# Altium PCB Sinistro_TestBed_RevA-1.PcbDoc (part 1 of 4)
Units mil, origin at the board's own origin, x right, y up, seen from the top; angles counter-clockwise.
Board outline 17000 x 8000 mil, 7 copper layers (Top Layer (*.GTL), MidLayer1 (*.G1), MidLayer2 (*.G2), MidLayer3 (*.G3), DIG GND (*.GP1), AGND (*.GP2), Bottom Layer (*.GBL)); 262 components, 309 nets, 2223 pads, 663 vias.
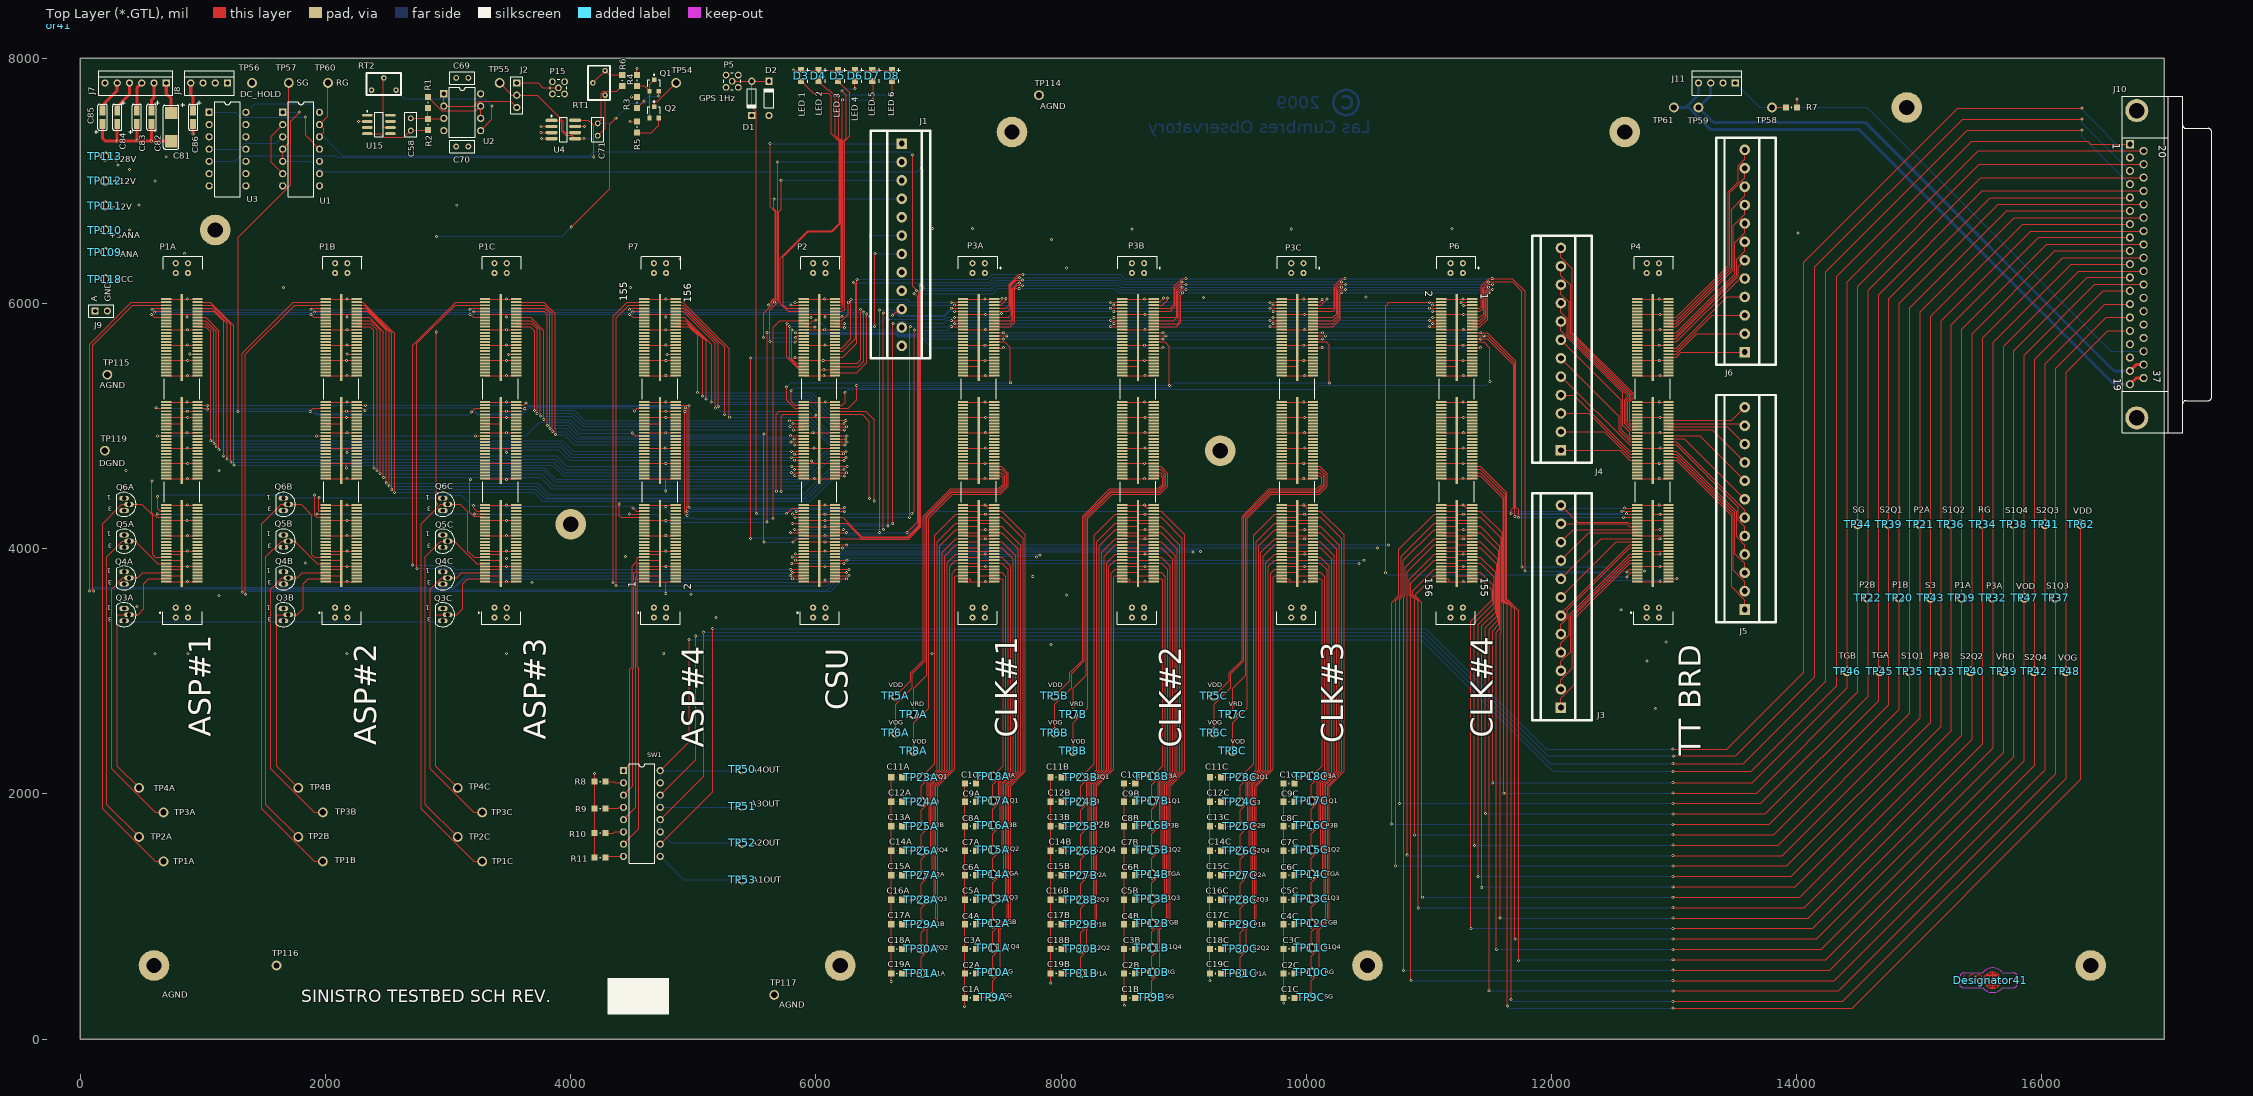
[diagram p0: Top Layer (*.GTL) view]
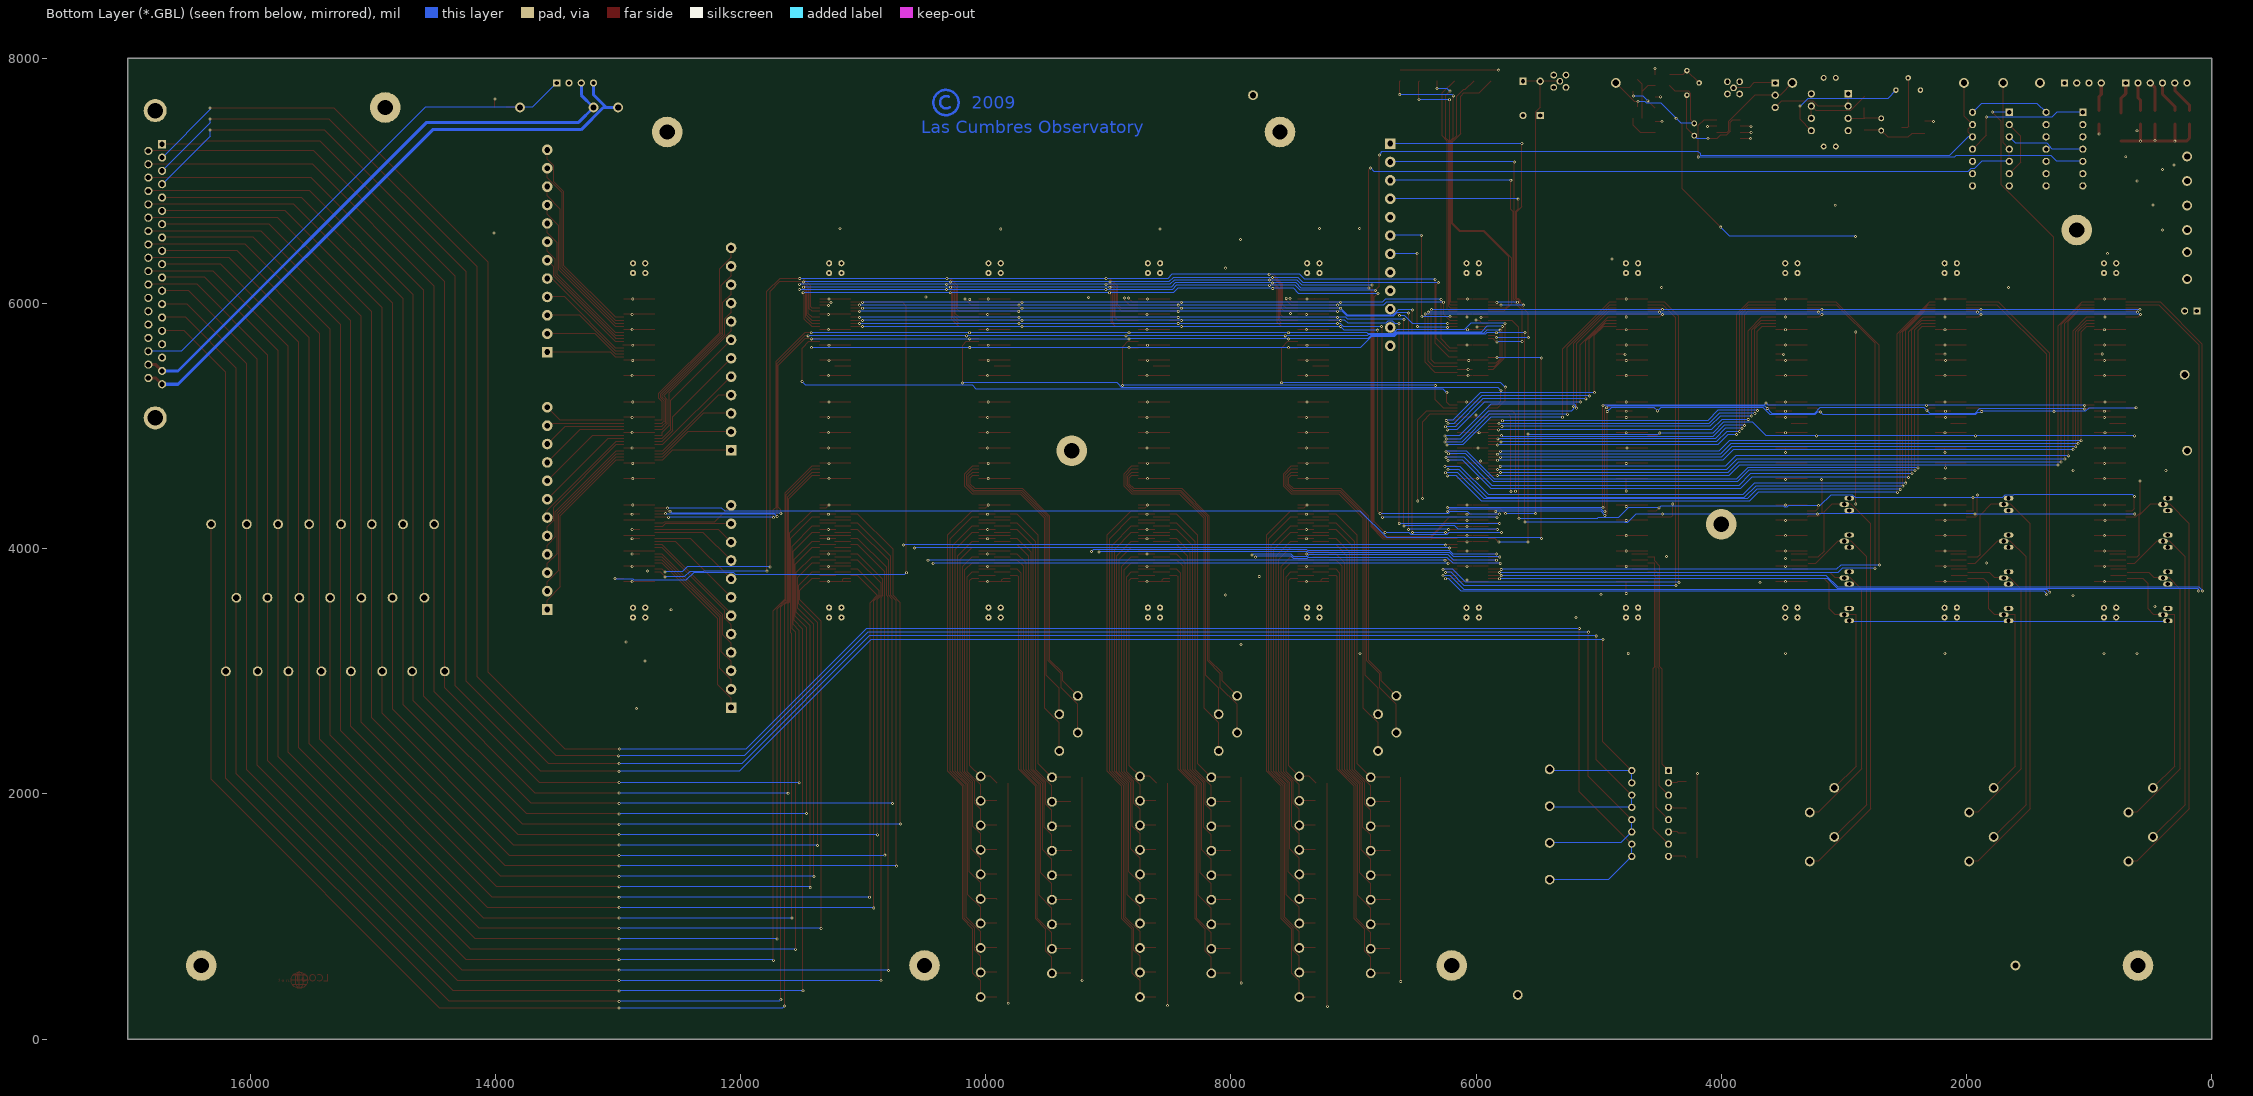
[diagram p1: Bottom Layer (*.GBL) view, seen from below]
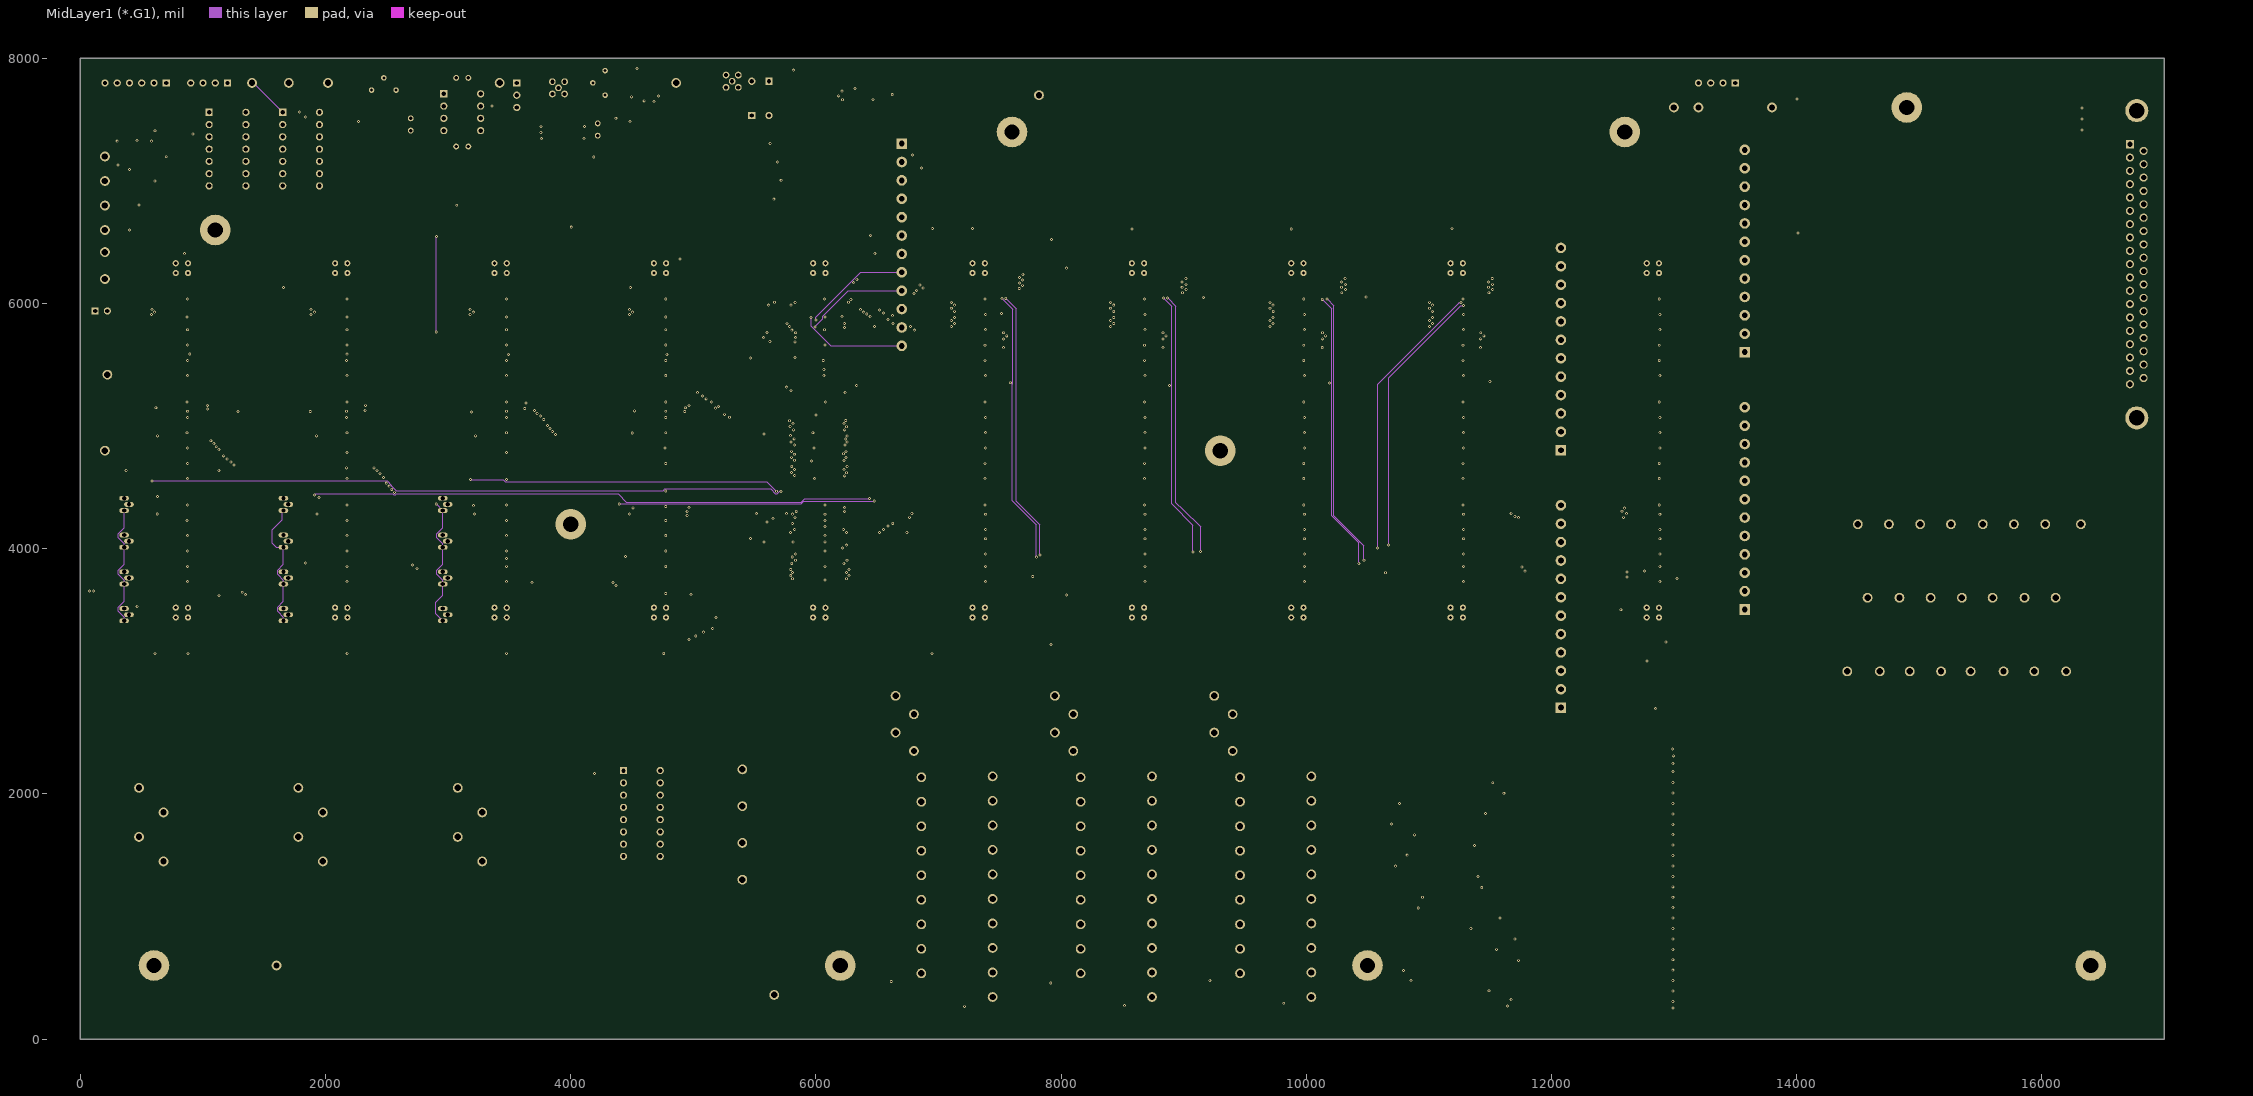
[diagram p2: MidLayer1 (*.G1)]
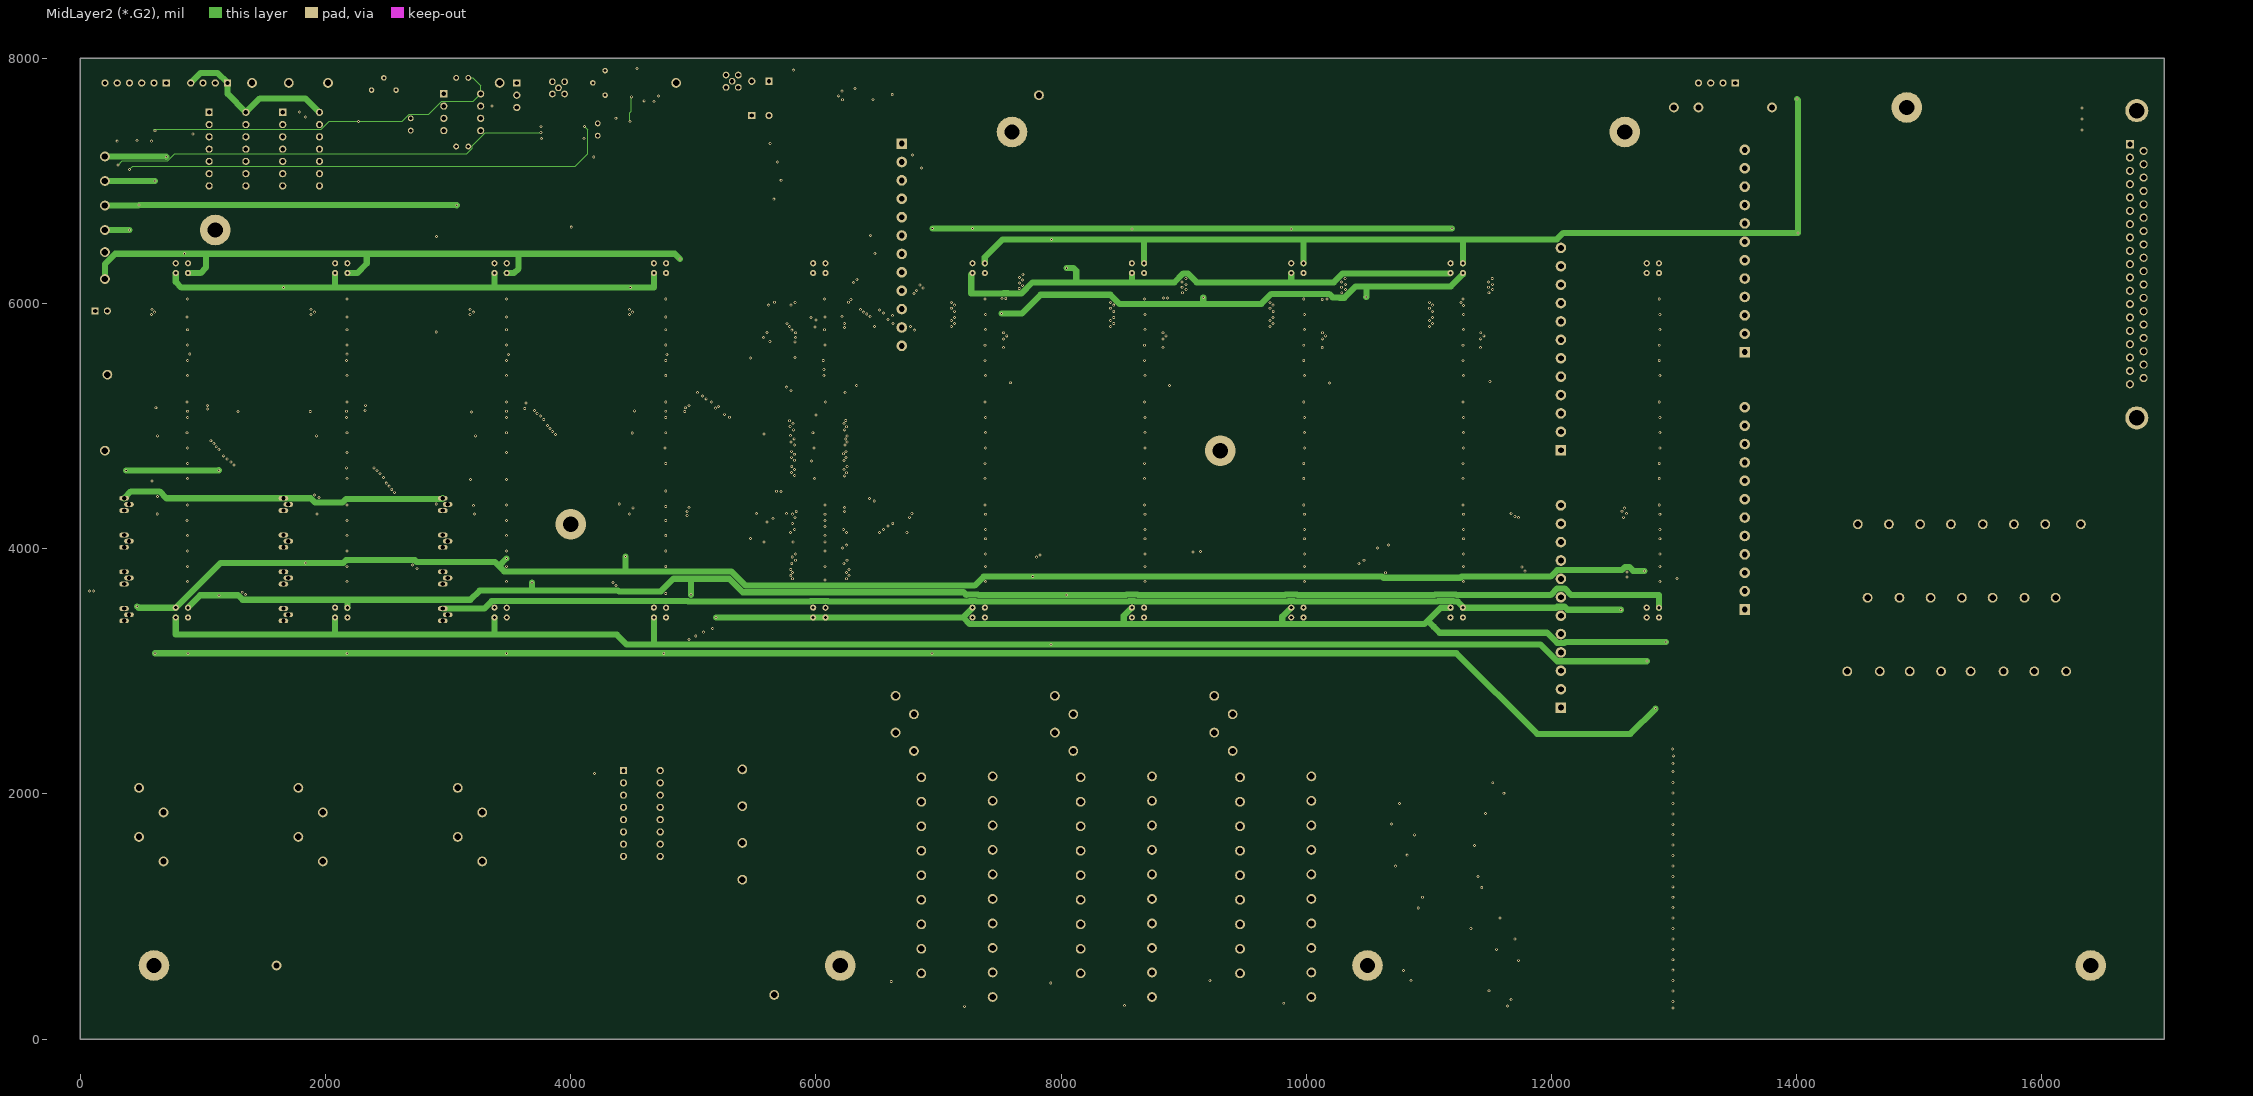
[diagram p3: MidLayer2 (*.G2)]
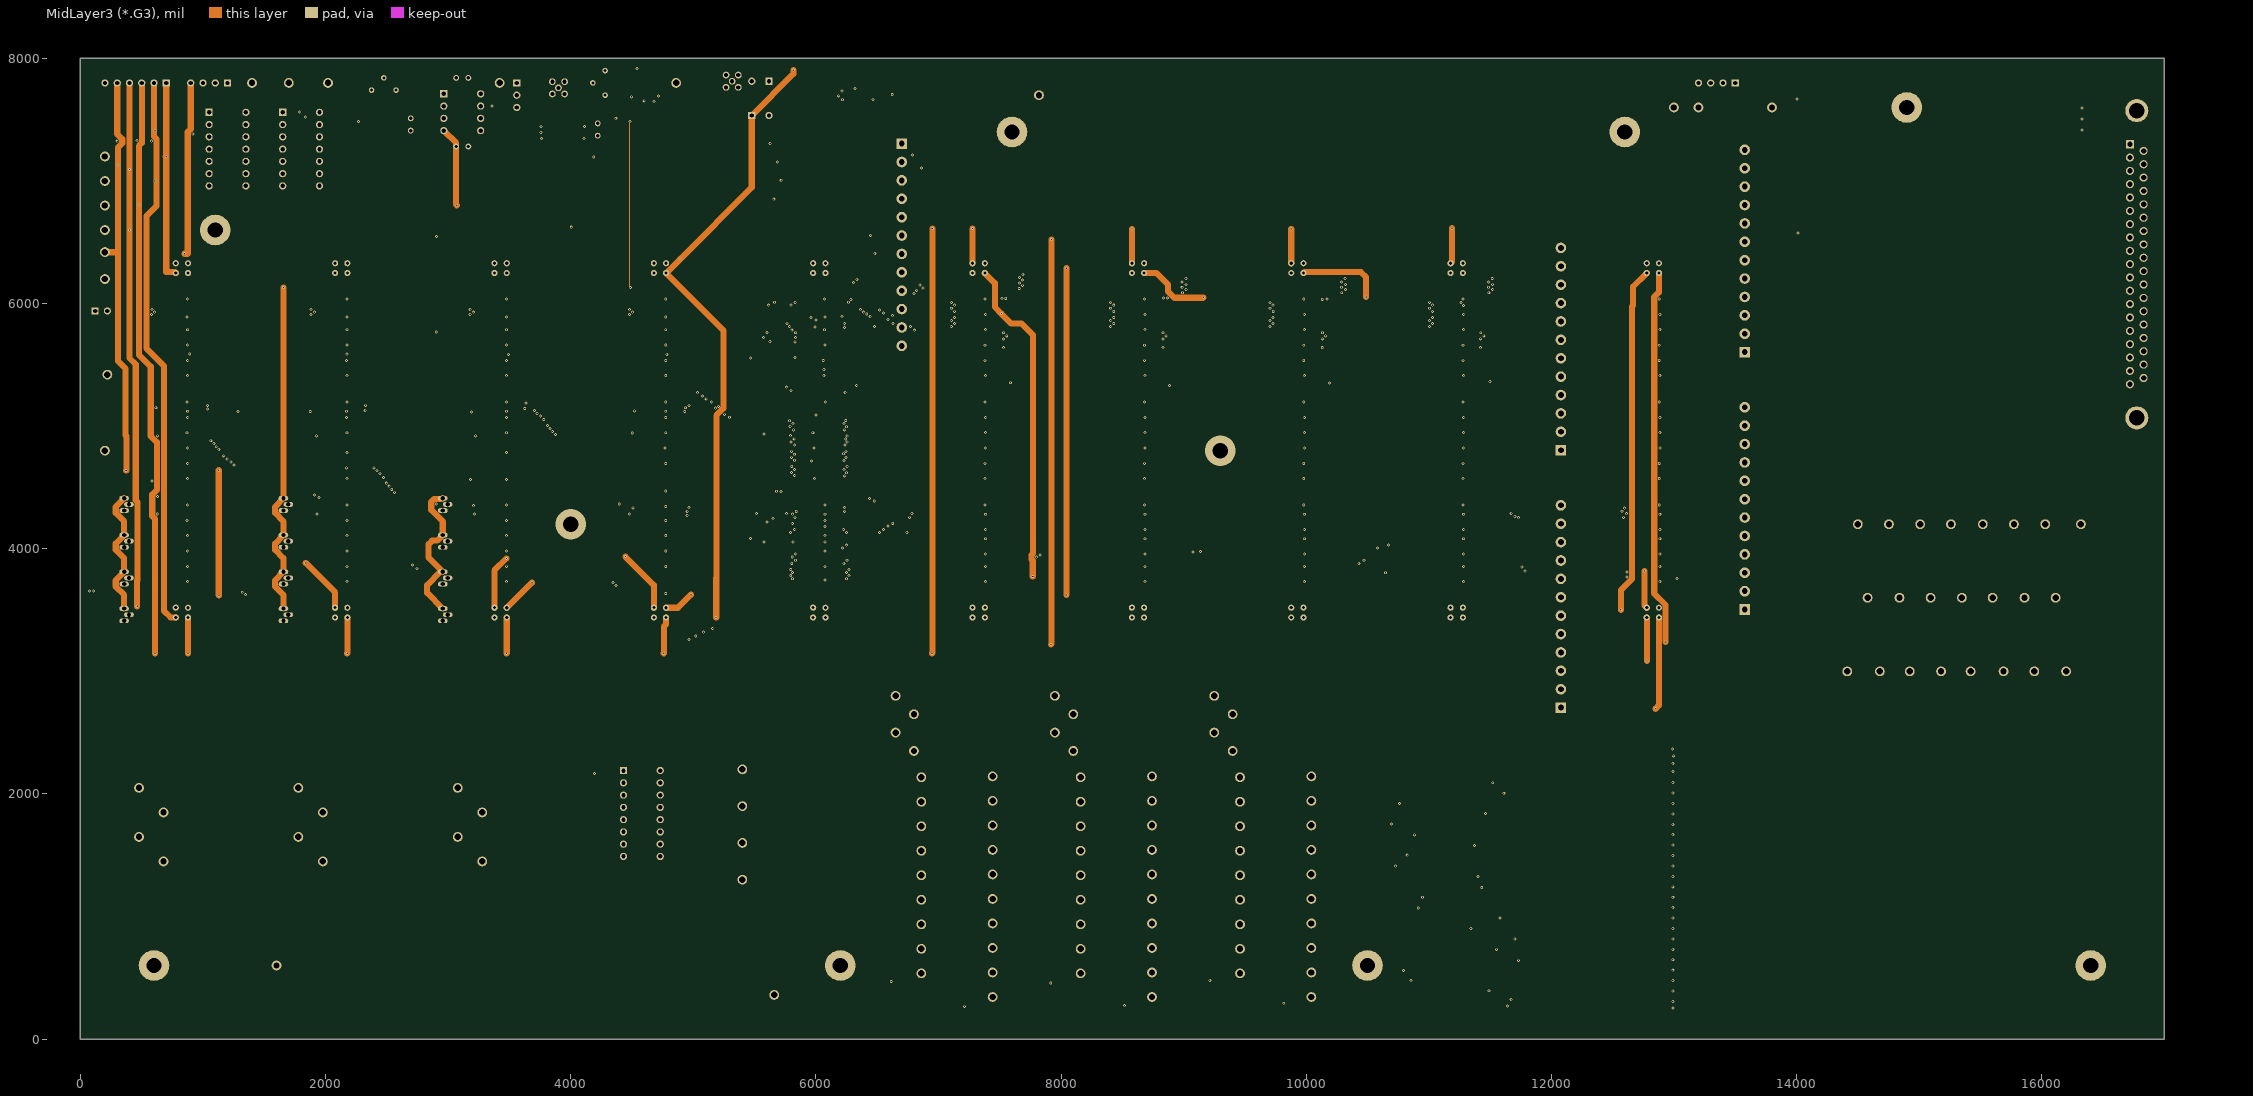
[diagram p4: MidLayer3 (*.G3)]
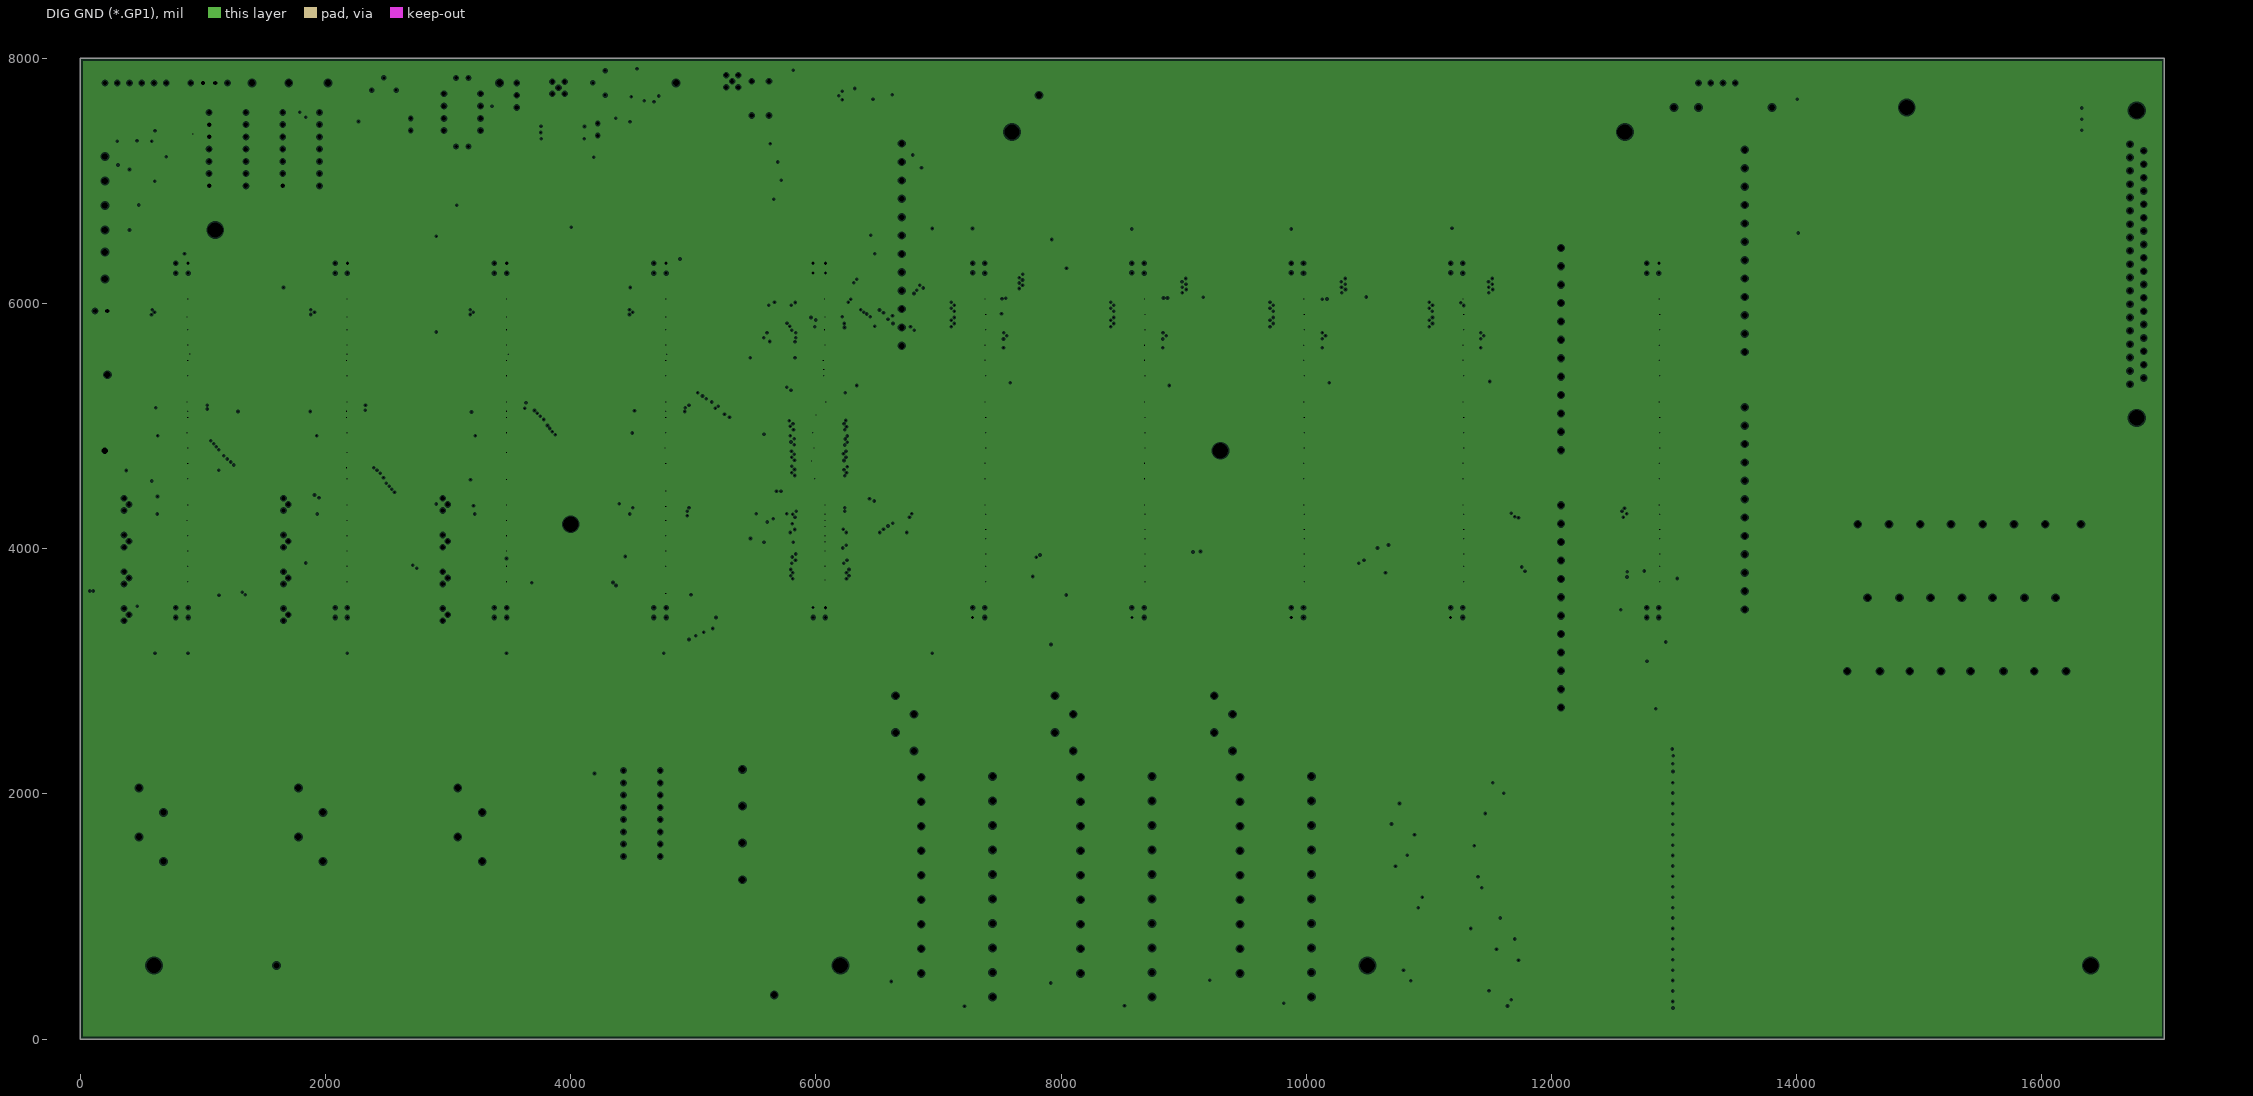
[diagram p5: DIG GND (*.GP1), clearances drawn from the general rule]
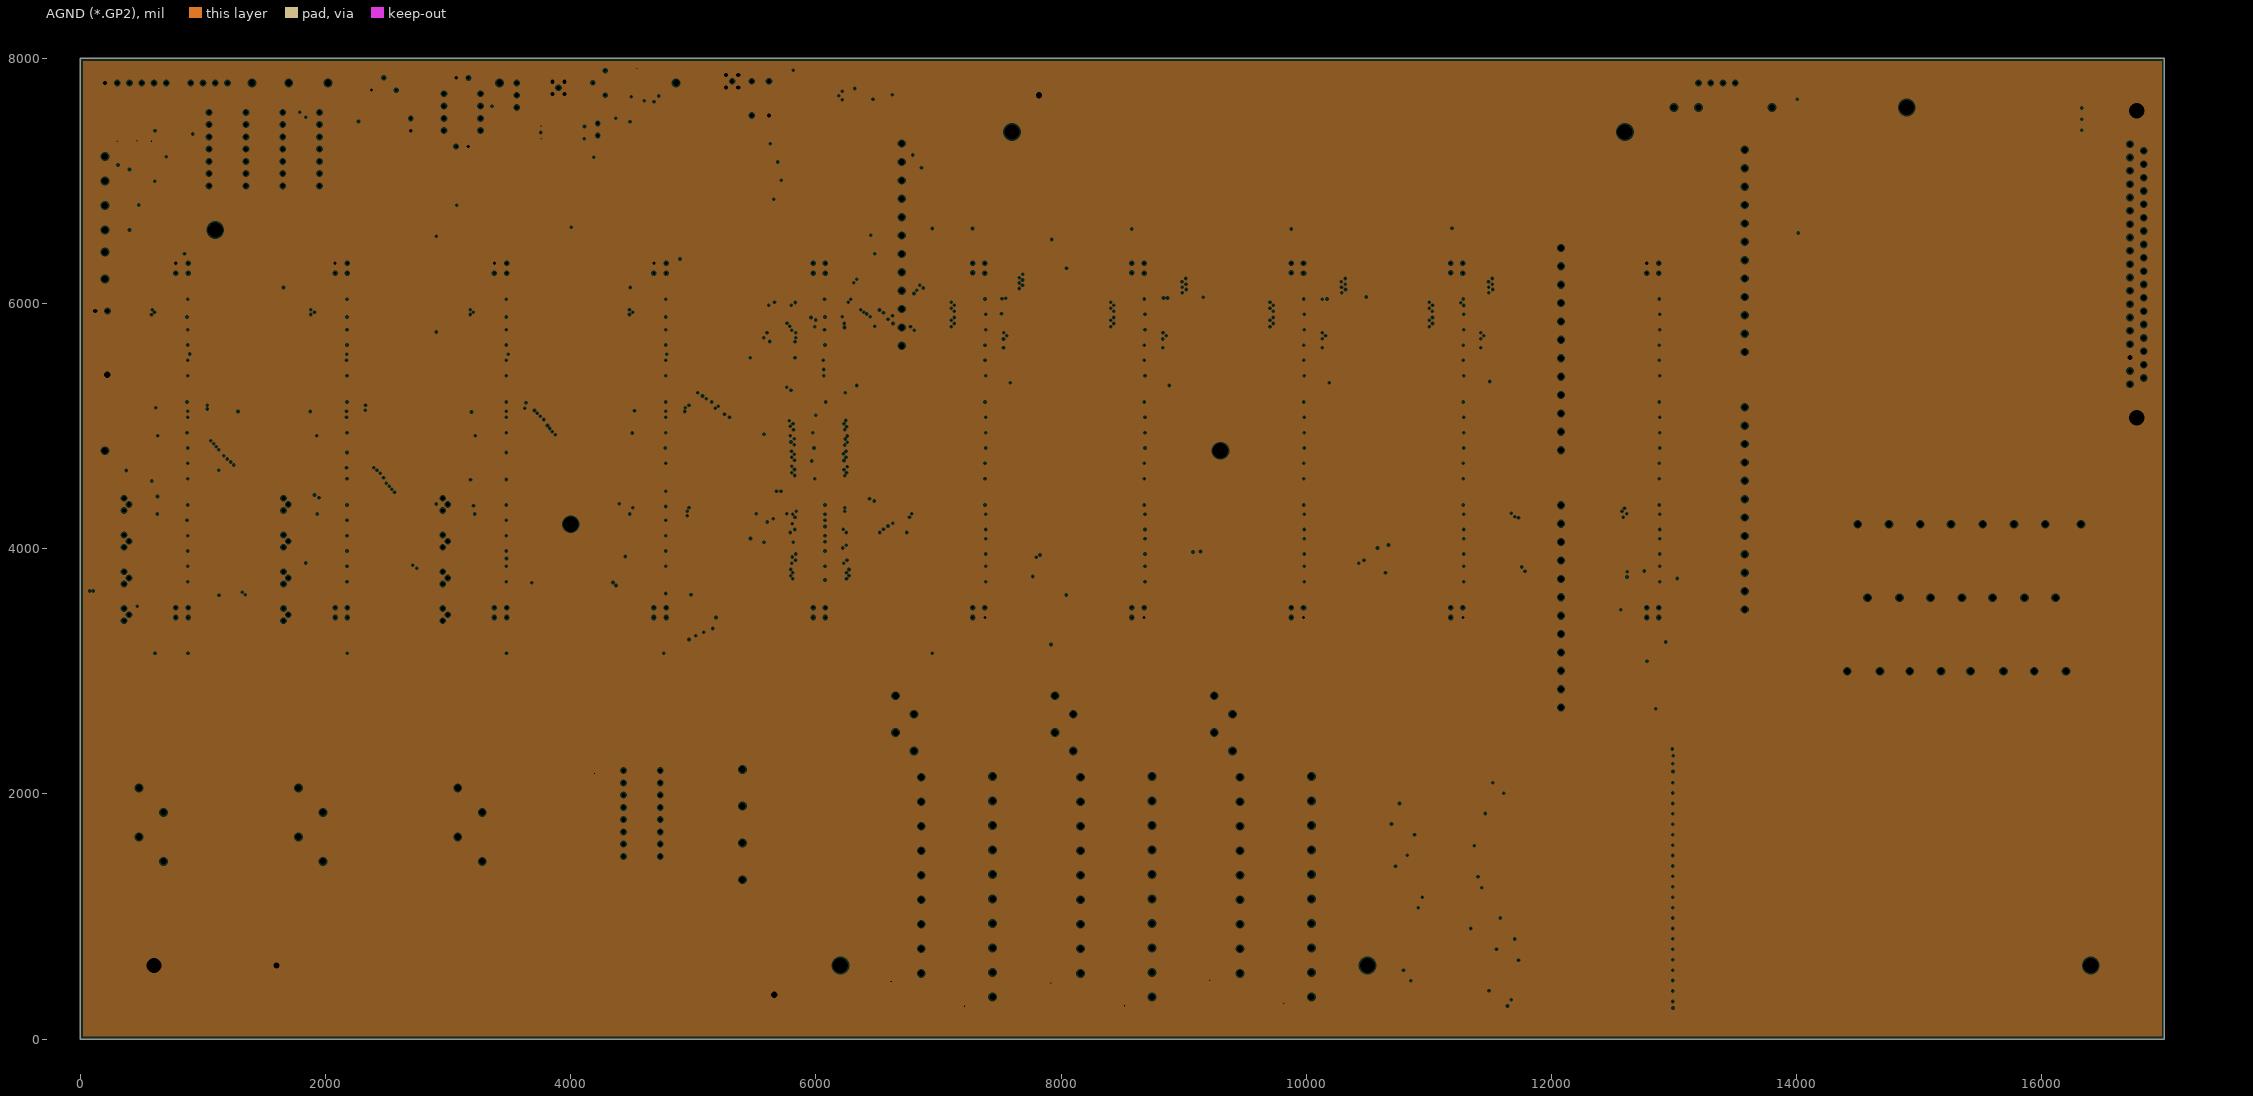
[diagram p6: AGND (*.GP2), clearances drawn from the general rule]

## Layer stack, top to bottom
Top Layer (*.GTL): signal copper 1.4
Dielectric: core 12.6, FR-4, Dk 4.8
MidLayer1 (*.G1): signal copper 1.4
Dielectric: prepreg 12.6, FR-4, Dk 4.8
MidLayer2 (*.G2): signal copper 1.4
Dielectric: core 12.6, FR-4, Dk 4.8
MidLayer3 (*.G3): signal copper 1.4
Dielectric: prepreg 12.6, FR-4, Dk 4.8
DIG GND (*.GP1): plane copper 1.4, net GND
Dielectric: core 12.6, FR-4, Dk 4.8
AGND (*.GP2): plane copper 1.4, net A
Dielectric: prepreg 12.6, FR-4, Dk 4.8
Bottom Layer (*.GBL): signal copper 1.4

## Board outline
0,0 0,8000 17000,8000 17000,0

## Design rules (kind name [scope] priority, off if disabled: settings)
Clearance "MSOP pad spacing" [(HasFootprint('TQFP48_m') or HasFootprint('RM-8'))] p1: gap=6
Clearance [All] p2: gap=4
ComponentClearance "P1/P2 clearance" [(InComponent('P1')) vs (InComponent('P2'))] p1: gap=-39.37 collisioncheckmode=3 verticalgap=10 showdistances=FALSE
ComponentClearance [All] p2: gap=5 collisioncheckmode=3 verticalgap=10 showdistances=TRUE
DiffPairsRouting [All] p1: maxlimit=10 minlimit=10 mostfreqgap=10 maxuncoupledlength=500
FabricationTestPointUsage TestPointUsage [All] p1: valid=0 allowmultiple=FALSE
FabricationTestpoint Testpoint [All] p1: side=3 testpointundercomponent=TRUE minsize=40 maxsize=100 preferedsize=60 minholesize=20 maxholesize=40 preferedholesize=32 testpointgrid=1 allowsidetop=TRUE allowsidebottom=TRUE usegrid=TRUE gridtolerance=0.01
HoleSize [All] p1: absolutevalues=TRUE maxlimit=300 minlimit=1 maxpercent=80.000 minpercent=20.000
PlaneClearance [All] p1: clearance=10
PlaneConnect PlaneConnect_1 [(InNet('E'))] p1: planeconnectstyle=Direct reliefexpansion=20 reliefentries=4 reliefconductorwidth=10 reliefairgap=10
PlaneConnect [All] p2: planeconnectstyle=Relief reliefexpansion=20 reliefentries=4 reliefconductorwidth=10 reliefairgap=10
PolygonConnect [All] p1: connectstyle=Relief reliefconductorwidth=10 reliefentries=4 polygonreliefangle="90 Angle"
RoomDefinition Sinistro_TestBed_10A [InComponentClass('Sinistro_TestBed_10A')] p1: confinementstyle=ConfineIn formatcopy=TRUE lockcomponents=FALSE outline 61,299 17396,299 17396,7953 61,7953
RoomDefinition "ASP BRD #4" [InComponentClass('ASP BRD #4')] p2: confinementstyle=ConfineIn formatcopy=TRUE lockcomponents=FALSE outline 4163,1425 4999,1425 4999,6415 4163,6415
RoomDefinition "ASP BRD #1" [InComponentClass('ASP BRD #1')] p3: confinementstyle=ConfineIn formatcopy=TRUE lockcomponents=FALSE outline 220,1402 1025,1402 1025,6415 220,6415
RoomDefinition "CLK BRD #4" [InComponentClass('CLK BRD #4')] p4: confinementstyle=ConfineIn formatcopy=TRUE lockcomponents=FALSE outline 10957.06,3353.03 10957.06,6400 11499.79,6400 11499.79,3353.03
RoomDefinition "CLK BRD #3" [InComponentClass('CLK BRD #3')] p5: confinementstyle=ConfineIn formatcopy=TRUE lockcomponents=FALSE outline 9183,296 10123,296 10123,6400 9183,6400
RoomDefinition "CLK BRD #2" [InComponentClass('CLK BRD #2')] p6: confinementstyle=ConfineIn formatcopy=TRUE lockcomponents=FALSE outline 7883,296 8823,296 8823,6400 7883,6400
RoomDefinition "CLK BRD #1" [InComponentClass('CLK BRD #1')] p7: confinementstyle=ConfineIn formatcopy=TRUE lockcomponents=FALSE outline 6583,296 7523,296 7523,6400 6583,6400
RoomDefinition "ASP BRD #3" [InComponentClass('ASP BRD #3')] p8: confinementstyle=ConfineIn formatcopy=TRUE lockcomponents=FALSE outline 2820,1402 3625,1402 3625,6415 2820,6415
RoomDefinition "ASP BRD #2" [InComponentClass('ASP BRD #2')] p9: confinementstyle=ConfineIn formatcopy=TRUE lockcomponents=FALSE outline 1520,1402 2325,1402 2325,6415 1520,6415
RoutingVias [All] p1: holewidth=10 width=24 viastyle="Through Hole" minholewidth=10 minwidth=24 maxholewidth=25 maxwidth=50
RoutingVias "Dig 5V/Gnd via" [(InNet('+5') OR InNet('D'))] p2: holewidth=28 width=50 viastyle="Through Hole" minholewidth=28 minwidth=50 maxholewidth=28 maxwidth=50
RoutingVias "Via for Analog power" [(InNet('-5ANA') OR InNet('+5ANA')OR InNet(A)OR InNet('+24V'))] p3: holewidth=18 width=30 viastyle="Through Hole" minholewidth=18 minwidth=30 maxholewidth=18 maxwidth=30
SilkscreenOverComponentPads [All] p1: minsilkscreentomaskgap=10
SolderMaskExpansion [All] p1: expansion=2
Width Width_1 [All] p1: maxlimit=50 minlimit=5 preferedwidth=5
Width "Analog power" [(InNet('-5ANA') OR InNet('+5ANA') OR InNet(A)or InNet('+24V'))] p2: maxlimit=15 minlimit=15 preferedwidth=15
Width "+5V/DGND trace" [(InNet('+5') OR InNet('D'))] p3: maxlimit=50 minlimit=10 preferedwidth=50 midlayer1_minwidth=50 midlayer2_minwidth=50 midlayer3_minwidth=50 bottomlayer_minwidth=50 minimp=50.000000 maximp=50.000000 favimp=50.000000
20 further rules are at their usual default settings.

## Classes and differential pairs
component class "ASP BRD #4": P7 R8 R9 R10 R11 SW1
component class "CLK BRD #4": P6
component class "ASP BRD #1": P1A Q3A Q4A Q5A Q6A TP1A TP2A TP3A TP4A
component class "ASP BRD #2": P1B Q3B Q4B Q5B Q6B TP1B TP2B TP3B TP4B
component class "ASP BRD #3": P1C Q3C Q4C Q5C Q6C TP1C TP2C TP3C TP4C
component class "CLK BRD #1": C1A C2A C3A C4A C5A C6A C7A C8A C9A C10A C11A C12A C13A C14A C15A C16A C17A C18A C19A P3A TP5A TP6A TP7A TP8A TP9A TP10A TP11A TP12A TP13A TP14A TP15A TP16A TP17A TP18A TP23A TP24A TP25A TP26A TP27A TP28A TP29A TP30A TP31A
component class "CLK BRD #2": C1B C2B C3B C4B C5B C6B C7B C8B C9B C10B C11B C12B C13B C14B C15B C16B C17B C18B C19B P3B TP5B TP6B TP7B TP8B TP9B TP10B TP11B TP12B TP13B TP14B TP15B TP16B TP17B TP18B TP23B TP24B TP25B TP26B TP27B TP28B TP29B TP30B TP31B
component class "CLK BRD #3": C1C C2C C3C C4C C5C C6C C7C C8C C9C C10C C11C C12C C13C C14C C15C C16C C17C C18C C19C P3C TP5C TP6C TP7C TP8C TP9C TP10C TP11C TP12C TP13C TP14C TP15C TP16C TP17C TP18C TP23C TP24C TP25C TP26C TP27C TP28C TP29C TP30C TP31C
component class Sinistro_TestBed_10A: C58 C69 C70 C71 C81 C82 C83 C84 C85 C86 D1 D2 D3 D4 D5 D6 D7 D8 J1 J2 J3 J4 J5 J6 J7 J8 J9 J10 J11 P1 P2 P3 P4 P5 P8 P9 P15 Q1 Q2 R1 R2 R3 R4 R5 R6 R7 RT1 RT2 TP19 TP20 TP21 TP22 TP32 TP33 TP34 TP35 TP36 TP37 TP38 TP39 TP40 TP41 TP42 TP43 TP44 TP45 TP46 TP47 TP48 TP49 TP50 TP51 TP52 TP53 TP54 TP55 TP56 TP57 TP58 TP59 TP60 TP61 TP62 TP109 TP110 TP111 TP112 TP113 TP114 TP115 TP116 TP117 TP118 TP119 TP? U1 U2 U3 U4 U15
net class ASP_1_DAT[0..7]: ASP_1_DAT0 ASP_1_DAT1 ASP_1_DAT2 ASP_1_DAT3 ASP_1_DAT4 ASP_1_DAT5 ASP_1_DAT6 ASP_1_DAT7
net class ASP_2_DAT[0..7]: ASP_2_DAT0 ASP_2_DAT1 ASP_2_DAT2 ASP_2_DAT3 ASP_2_DAT4 ASP_2_DAT5 ASP_2_DAT6 ASP_2_DAT7
net class ASP_3_DAT[0..7]: ASP_3_DAT0 ASP_3_DAT1 ASP_3_DAT2 ASP_3_DAT3 ASP_3_DAT4 ASP_3_DAT5 ASP_3_DAT6 ASP_3_DAT7
net class ASP_4_DAT[0..7]: ASP_4_DAT0 ASP_4_DAT1 ASP_4_DAT2 ASP_4_DAT3 ASP_4_DAT4 ASP_4_DAT5 ASP_4_DAT6 ASP_4_DAT7
channel class Sinistro_TestBed_11A: "CLK BRD #1" "CLK BRD #2" "CLK BRD #3" "CLK BRD #4"
channel class Sinistro_TestBed_12A: "ASP BRD #1" "ASP BRD #2" "ASP BRD #3" "ASP BRD #4"
differential pair CLK_0: +CLK_0_P -CLK_0_N
differential pair CLK_1: +CLK_1_P -CLK_1_N
differential pair CLK_2: +CLK_2_P -CLK_2_N
differential pair CLK_3: +CLK_3_P -CLK_3_N
differential pair CLK_4: +CLK_4_P -CLK_4_N
differential pair CLK_5: +CLK_5_P -CLK_5_N
differential pair CLK_6: +CLK_6_P -CLK_6_N
differential pair CLK_7: +CLK_7_P -CLK_7_N
differential pair CLK_8: +CLK_8_P -CLK_8_N
differential pair CLK_9: +CLK_9_P -CLK_9_N

## Components (designator, comment, footprint, x,y, rotation, side; value= is the part's Value field where it differs from the comment)
C1A "Cap SMD" SMD_0805 7260,336 r180 top (schematic designator C1)
C1B "Cap SMD" SMD_0805 8560,336 r180 top (schematic designator C1)
C1C "Cap SMD" SMD_0805 9860,336 r180 top (schematic designator C1)
C2A "Cap SMD" SMD_0805 7260,536 r180 top (schematic designator C2)
C2B "Cap SMD" SMD_0805 8560,536 r180 top (schematic designator C2)
C2C "Cap SMD" SMD_0805 9860,536 r180 top (schematic designator C2)
C3A "Cap SMD" SMD_0805 7260,736 r180 top (schematic designator C3)
C3B "Cap SMD" SMD_0805 8560,736 r180 top (schematic designator C3)
C3C "Cap SMD" SMD_0805 9860,736 r180 top (schematic designator C3)
C4A "Cap SMD" SMD_0805 7260,936 r180 top (schematic designator C4)
C4B "Cap SMD" SMD_0805 8560,936 r180 top (schematic designator C4)
C4C "Cap SMD" SMD_0805 9860,936 r180 top (schematic designator C4)
C5A "Cap SMD" SMD_0805 7260,1136 r180 top (schematic designator C5)
C5B "Cap SMD" SMD_0805 8560,1136 r180 top (schematic designator C5)
C5C "Cap SMD" SMD_0805 9860,1136 r180 top (schematic designator C5)
C6A "Cap SMD" SMD_0805 7260,1336 r180 top (schematic designator C6)
C6B "Cap SMD" SMD_0805 8560,1336 r180 top (schematic designator C6)
C6C "Cap SMD" SMD_0805 9860,1336 r180 top (schematic designator C6)
C7A "Cap SMD" SMD_0805 7260,1536 r180 top (schematic designator C7)
C7B "Cap SMD" SMD_0805 8560,1536 r180 top (schematic designator C7)
C7C "Cap SMD" SMD_0805 9860,1536 r180 top (schematic designator C7)
C8A "Cap SMD" SMD_0805 7260,1736 r180 top (schematic designator C8)
C8B "Cap SMD" SMD_0805 8560,1736 r180 top (schematic designator C8)
C8C "Cap SMD" SMD_0805 9860,1736 r180 top (schematic designator C8)
C9A "Cap SMD" SMD_0805 7260,1936 r180 top (schematic designator C9)
C9B "Cap SMD" SMD_0805 8560,1936 r180 top (schematic designator C9)
C9C "Cap SMD" SMD_0805 9860,1936 r180 top (schematic designator C9)
C10A "Cap SMD" SMD_0805 7260,2086 r180 top (schematic designator C10)
C10B "Cap SMD" SMD_0805 8560,2086 r180 top (schematic designator C10)
C10C "Cap SMD" SMD_0805 9860,2086 r180 top (schematic designator C10)
C11A "Cap SMD" SMD_0805 6660,2136 r180 top (schematic designator C11)
C11B "Cap SMD" SMD_0805 7960,2136 r180 top (schematic designator C11)
C11C "Cap SMD" SMD_0805 9260,2136 r180 top (schematic designator C11)
C12A "Cap SMD" SMD_0805 6660,1936 r180 top (schematic designator C12)
C12B "Cap SMD" SMD_0805 7960,1936 r180 top (schematic designator C12)
C12C "Cap SMD" SMD_0805 9260,1936 r180 top (schematic designator C12)
C13A "Cap SMD" SMD_0805 6660,1736 r180 top (schematic designator C13)
C13B "Cap SMD" SMD_0805 7960,1736 r180 top (schematic designator C13)
C13C "Cap SMD" SMD_0805 9260,1736 r180 top (schematic designator C13)
C14A "Cap SMD" SMD_0805 6660,1536 r180 top (schematic designator C14)
C14B "Cap SMD" SMD_0805 7960,1536 r180 top (schematic designator C14)
C14C "Cap SMD" SMD_0805 9260,1536 r180 top (schematic designator C14)
C15A "Cap SMD" SMD_0805 6660,1336 r180 top (schematic designator C15)
C15B "Cap SMD" SMD_0805 7960,1336 r180 top (schematic designator C15)
C15C "Cap SMD" SMD_0805 9260,1336 r180 top (schematic designator C15)
C16A "Cap SMD" SMD_0805 6660,1136 r180 top (schematic designator C16)
C16B "Cap SMD" SMD_0805 7960,1136 r180 top (schematic designator C16)
C16C "Cap SMD" SMD_0805 9260,1136 r180 top (schematic designator C16)
C17A "Cap SMD" SMD_0805 6660,936 r180 top (schematic designator C17)
C17B "Cap SMD" SMD_0805 7960,936 r180 top (schematic designator C17)
C17C "Cap SMD" SMD_0805 9260,936 r180 top (schematic designator C17)
C18A "Cap SMD" SMD_0805 6660,736 r180 top (schematic designator C18)
C18B "Cap SMD" SMD_0805 7960,736 r180 top (schematic designator C18)
C18C "Cap SMD" SMD_0805 9260,736 r180 top (schematic designator C18)
C19A "Cap SMD" SMD_0805 6660,536 r180 top (schematic designator C19)
C19B "Cap SMD" SMD_0805 7960,536 r180 top (schematic designator C19)
C19C "Cap SMD" SMD_0805 9260,536 r180 top (schematic designator C19)
C58 "Cap TH" RAD-0.1 2695,7461 r90 top
C69 "Cap TH" RAD-0.1 3115,7841 r0 top
C70 "Cap TH" RAD-0.1 3115,7281 r180 top
C71 "Cap TH" RAD-0.1 4220,7420 r90 top
C81 "35V" SMD_CAP_6032 740,7440 r90 top
C82 "15V" SMD_CAP_3216 580,7520 r90 top
C83 "15V" SMD_CAP_3216 460,7520 r270 top
C84 "15V" SMD_CAP_3216 300,7520 r90 top
C85 "15V" SMD_CAP_3216 180,7520 r270 top
C86 "15V" SMD_CAP_3216 920,7520 r90 top
D1 "Diode 1N914" DO-35 5477,7674 r270 top
D2 "Diode 1N914" DO-35 5617,7674 r90 top
D3 "LED SMD" SMD_0805_LED 5880,7860 r270 top
D4 "LED SMD" SMD_0805_LED 6020,7860 r270 top
D5 "LED SMD" SMD_0805_LED 6180,7860 r270 top
D6 "LED SMD" SMD_0805_LED 6320,7860 r270 top
D7 "LED SMD" SMD_0805_LED 6460,7860 r270 top
D8 "LED SMD" SMD_0805_LED 6620,7860 r270 top
Designator40 "Comment" "TARGET MECHANICAL 5" -640,220 r0 top
Designator41 "Comment" "TARGET MECHANICAL 5" -382,8269 r0 top
Designator41 "Comment" "LCOGT LOGO TOP" 15580,480 r0 top
Designator42 "Comment" "TARGET MECHANICAL 5" 16859,8510 r0 top
J1 "Header 12 for screw term" "HDR 1x12 PHX" 6700,6480 r90 top
J2 "Header 3" HDR1X3 3560,7800 r270 top
J3 "Header 12 for screw term" "HDR 1x12 PHX" 12077.96,3529.02 r270 top
J4 "Header 12 for screw term" "HDR 1x12 PHX" 12077.96,5629.02 r270 top
J5 "Header 12 for screw term" "HDR 1x12 PHX" 13577.96,4329.02 r270 top
J6 "Header 12 for screw term" "HDR 1x12 PHX" 13577.96,6429.02 r270 top
J7 "Header 6" "HDR1X6 for IDC" 700,7800 r180 top
J8 "Header 4" "HDR1X4 for IDC" 1200,7800 r180 top
J9 "Header 2" HDR1X2 120,5940 r0 top
J10 "D Connector 37" "DSUB37 RT FEM" 16720,7300 r270 top
J11 "Header 4" "HDR1X4 for IDC" 13500,7800 r180 top
P1A "QFSS-PC4" "QFS SMD PWR PINS"#1 827.96,4884.02 r90 top (schematic designator P1)
P1B "QFSS-PC4" "QFS SMD PWR PINS"#1 2127.96,4884.02 r90 top (schematic designator P1)
P1C "QFSS-PC4" "QFS SMD PWR PINS"#1 3427.96,4884.02 r90 top (schematic designator P1)
P2 "QFSS-PC4" "QFS SMD PWR PINS"#1 6027.96,4884.02 r90 top
P3A "QFSS-PC4" "QFS SMD PWR PINS"#1 7327.96,4884.02 r270 top (schematic designator P3)
P3B "QFSS-PC4" "QFS SMD PWR PINS"#1 8627.96,4884.02 r270 top (schematic designator P3)
P3C "QFSS-PC4" "QFS SMD PWR PINS"#1 9927.96,4884.02 r270 top (schematic designator P3)
P4 "QFSS-PC4" "QFS SMD PWR PINS"#1 12827.96,4884.02 r90 top
P5 "COAX-M" MMCX2.54-V5 5317,7814 r0 top
P6 "QFSS-PC4" "QFS SMD PWR PINS"#2 11227.96,4884.02 r270 top locked
P7 "QFSS-PC4" "QFS SMD PWR PINS"#2 4727.96,4884.02 r90 top
P15 "COAX-M" MMCX2.54-V5 3900,7760 r0 top
Q1 "2N3906" SOT23 4680,7780 r0 top
Q2 "2N3906" SOT23 4680,7560 r0 top
Q3A "J111" "TO-92A OFFSET" 356.2,3461.77 r180 top (schematic designator Q3)
Q3B "J111" "TO-92A OFFSET" 1656.2,3461.77 r180 top (schematic designator Q3)
Q3C "J111" "TO-92A OFFSET" 2956.2,3461.77 r180 top (schematic designator Q3)
Q4A "J111" "TO-92A OFFSET" 356.2,3761.77 r180 top (schematic designator Q4)
Q4B "J111" "TO-92A OFFSET" 1656.2,3761.77 r180 top (schematic designator Q4)
Q4C "J111" "TO-92A OFFSET" 2956.2,3761.77 r180 top (schematic designator Q4)
Q5A "J111" "TO-92A OFFSET" 356.2,4061.77 r180 top (schematic designator Q5)
Q5B "J111" "TO-92A OFFSET" 1656.2,4061.77 r180 top (schematic designator Q5)
Q5C "J111" "TO-92A OFFSET" 2956.2,4061.77 r180 top (schematic designator Q5)
Q6A "J111" "TO-92A OFFSET" 356.2,4361.77 r180 top (schematic designator Q6)
Q6B "J111" "TO-92A OFFSET" 1656.2,4361.77 r180 top (schematic designator Q6)
Q6C "J111" "TO-92A OFFSET" 2956.2,4361.77 r180 top (schematic designator Q6)
R1 "Res SMD" SMD_0805 2835,7641 r90 top
R2 "Res SMD" SMD_0805 2835,7461 r90 top
R3 "Res SMD" SMD_0805 4540,7640 r90 top
R4 "Res SMD" SMD_0805 4540,7820 r270 top
R5 "Res SMD" SMD_0805 4540,7440 r90 top
R6 "Res SMD" SMD_0805 4420,7820 r270 top
R7 "Res 0805" SMD_0805 13960,7600 r180 top
R8 "Res 0805" SMD_0805 4240,2100 r0 top
R9 "Res 0805" SMD_0805 4240,1880 r0 top
R10 "Res 0805" SMD_0805 4240,1680 r0 top
R11 "Res 0805" SMD_0805 4240,1480 r0 top
RT1 "Pot Trim TH" "POT, BOURNS 3266W" 4180,7700 r90 top
RT2 "Pot Trim TH" "POT, BOURNS 3266W" 2375,7841 r0 top
SW1 "SW-DPST" DIP-16 4580,1840 r270 top
TP1A "Test point" PAD_80D_052H 677.96,1449.02 r270 top (schematic designator TP1)
TP1B "Test point" PAD_80D_052H 1977.96,1449.02 r270 top (schematic designator TP1)
TP1C "Test point" PAD_80D_052H 3277.96,1449.02 r270 top (schematic designator TP1)
TP2A "Test point" PAD_80D_052H 477.96,1649.02 r270 top (schematic designator TP2)
TP2B "Test point" PAD_80D_052H 1777.96,1649.02 r270 top (schematic designator TP2)
TP2C "Test point" PAD_80D_052H 3077.96,1649.02 r270 top (schematic designator TP2)
TP3A "Test point" PAD_80D_052H 677.96,1849.02 r270 top (schematic designator TP3)
TP3B "Test point" PAD_80D_052H 1977.96,1849.02 r270 top (schematic designator TP3)
TP3C "Test point" PAD_80D_052H 3277.96,1849.02 r270 top (schematic designator TP3)
TP4A "Test point" PAD_80D_052H 477.96,2049.02 r270 top (schematic designator TP4)
TP4B "Test point" PAD_80D_052H 1777.96,2049.02 r270 top (schematic designator TP4)
TP4C "Test point" PAD_80D_052H 3077.96,2049.02 r270 top (schematic designator TP4)
TP5A "Test point" PAD_80D_052H 6650,2800 r90 top (schematic designator TP5)
TP5B "Test point" PAD_80D_052H 7950,2800 r90 top (schematic designator TP5)
TP5C "Test point" PAD_80D_052H 9250,2800 r90 top (schematic designator TP5)
TP6A "Test point" PAD_80D_052H 6650,2500 r90 top (schematic designator TP6)
TP6B "Test point" PAD_80D_052H 7950,2500 r90 top (schematic designator TP6)
TP6C "Test point" PAD_80D_052H 9250,2500 r90 top (schematic designator TP6)
TP7A "Test point" PAD_80D_052H 6800,2650 r90 top (schematic designator TP7)
TP7B "Test point" PAD_80D_052H 8100,2650 r90 top (schematic designator TP7)
TP7C "Test point" PAD_80D_052H 9400,2650 r90 top (schematic designator TP7)
TP8A "Test point" PAD_80D_052H 6800,2350 r90 top (schematic designator TP8)
TP8B "Test point" PAD_80D_052H 8100,2350 r90 top (schematic designator TP8)
TP8C "Test point" PAD_80D_052H 9400,2350 r90 top (schematic designator TP8)
TP9A "Test point" PAD_80D_052H 7442,343 r0 top (schematic designator TP9)
TP9B "Test point" PAD_80D_052H 8742,343 r0 top (schematic designator TP9)
TP9C "Test point" PAD_80D_052H 10042,343 r0 top (schematic designator TP9)
TP10A "Test point" PAD_80D_052H 7442,543 r0 top (schematic designator TP10)
TP10B "Test point" PAD_80D_052H 8742,543 r0 top (schematic designator TP10)
TP10C "Test point" PAD_80D_052H 10042,543 r0 top (schematic designator TP10)
TP11A "Test point" PAD_80D_052H 7442,743 r0 top (schematic designator TP11)
TP11B "Test point" PAD_80D_052H 8742,743 r0 top (schematic designator TP11)
TP11C "Test point" PAD_80D_052H 10042,743 r0 top (schematic designator TP11)
TP12A "Test point" PAD_80D_052H 7442,943 r0 top (schematic designator TP12)
TP12B "Test point" PAD_80D_052H 8742,943 r0 top (schematic designator TP12)
TP12C "Test point" PAD_80D_052H 10042,943 r0 top (schematic designator TP12)
TP13A "Test point" PAD_80D_052H 7442,1143 r0 top (schematic designator TP13)
TP13B "Test point" PAD_80D_052H 8742,1143 r0 top (schematic designator TP13)
TP13C "Test point" PAD_80D_052H 10042,1143 r0 top (schematic designator TP13)
TP14A "Test point" PAD_80D_052H 7442,1343 r0 top (schematic designator TP14)
TP14B "Test point" PAD_80D_052H 8742,1343 r0 top (schematic designator TP14)
TP14C "Test point" PAD_80D_052H 10042,1343 r0 top (schematic designator TP14)
TP15A "Test point" PAD_80D_052H 7442,1543 r0 top (schematic designator TP15)
TP15B "Test point" PAD_80D_052H 8742,1543 r0 top (schematic designator TP15)
TP15C "Test point" PAD_80D_052H 10042,1543 r0 top (schematic designator TP15)
TP16A "Test point" PAD_80D_052H 7442,1743 r0 top (schematic designator TP16)
TP16B "Test point" PAD_80D_052H 8742,1743 r0 top (schematic designator TP16)
TP16C "Test point" PAD_80D_052H 10042,1743 r0 top (schematic designator TP16)
TP17A "Test point" PAD_80D_052H 7442,1943 r0 top (schematic designator TP17)
TP17B "Test point" PAD_80D_052H 8742,1943 r0 top (schematic designator TP17)
TP17C "Test point" PAD_80D_052H 10042,1943 r0 top (schematic designator TP17)
TP18A "Test point" PAD_80D_052H 7442,2143 r0 top (schematic designator TP18)
TP18B "Test point" PAD_80D_052H 8742,2143 r0 top (schematic designator TP18)
TP18C "Test point" PAD_80D_052H 10042,2143 r0 top (schematic designator TP18)
TP19 "Test point" PAD_80D_052H 15349,3600 r90 top
TP20 "Test point" PAD_80D_052H 14840,3600 r90 top
TP21 "Test point" PAD_80D_052H 15009,4200 r180 top
TP22 "Test point" PAD_80D_052H 14580,3600 r180 top
TP23A "Test point" PAD_80D_052H 6860,2136 r0 top (schematic designator TP23)
TP23B "Test point" PAD_80D_052H 8160,2136 r0 top (schematic designator TP23)
TP23C "Test point" PAD_80D_052H 9460,2136 r0 top (schematic designator TP23)
TP24A "Test point" PAD_80D_052H 6860,1936 r0 top (schematic designator TP24)
TP24B "Test point" PAD_80D_052H 8160,1936 r0 top (schematic designator TP24)
TP24C "Test point" PAD_80D_052H 9460,1936 r0 top (schematic designator TP24)
TP25A "Test point" PAD_80D_052H 6860,1736 r0 top (schematic designator TP25)
TP25B "Test point" PAD_80D_052H 8160,1736 r0 top (schematic designator TP25)
TP25C "Test point" PAD_80D_052H 9460,1736 r0 top (schematic designator TP25)
TP26A "Test point" PAD_80D_052H 6860,1536 r0 top (schematic designator TP26)
TP26B "Test point" PAD_80D_052H 8160,1536 r0 top (schematic designator TP26)
TP26C "Test point" PAD_80D_052H 9460,1536 r0 top (schematic designator TP26)
TP27A "Test point" PAD_80D_052H 6860,1336 r0 top (schematic designator TP27)
TP27B "Test point" PAD_80D_052H 8160,1336 r0 top (schematic designator TP27)
TP27C "Test point" PAD_80D_052H 9460,1336 r0 top (schematic designator TP27)
TP28A "Test point" PAD_80D_052H 6860,1136 r0 top (schematic designator TP28)
TP28B "Test point" PAD_80D_052H 8160,1136 r0 top (schematic designator TP28)
TP28C "Test point" PAD_80D_052H 9460,1136 r0 top (schematic designator TP28)
TP29A "Test point" PAD_80D_052H 6860,936 r0 top (schematic designator TP29)
TP29B "Test point" PAD_80D_052H 8160,936 r0 top (schematic designator TP29)
TP29C "Test point" PAD_80D_052H 9460,936 r0 top (schematic designator TP29)
TP30A "Test point" PAD_80D_052H 6860,736 r0 top (schematic designator TP30)
TP30B "Test point" PAD_80D_052H 8160,736 r0 top (schematic designator TP30)
TP30C "Test point" PAD_80D_052H 9460,736 r0 top (schematic designator TP30)
TP31A "Test point" PAD_80D_052H 6860,536 r0 top (schematic designator TP31)
TP31B "Test point" PAD_80D_052H 8160,536 r0 top (schematic designator TP31)
TP31C "Test point" PAD_80D_052H 9460,536 r0 top (schematic designator TP31)
TP32 "Test point" PAD_80D_052H 15600,3600 r90 top
TP33 "Test point" PAD_80D_052H 15179,3000 r90 top
TP34 "Test point" PAD_80D_052H 15520,4200 r180 top
TP35 "Test point" PAD_80D_052H 14924,3000 r180 top
TP36 "Test point" PAD_80D_052H 15260,4200 r180 top
TP37 "Test point" PAD_80D_052H 16114,3600 r90 top
TP38 "Test point" PAD_80D_052H 15774,4200 r180 top
TP39 "Test point" PAD_80D_052H 14754,4200 r180 top
TP40 "Test point" PAD_80D_052H 15420,3000 r180 top
TP41 "Test point" PAD_80D_052H 16029,4200 r180 top
TP42 "Test point" PAD_80D_052H 15940,3000 r180 top
TP43 "Test point" PAD_80D_052H 15094,3600 r180 top
TP44 "Test point" PAD_80D_052H 14500,4200 r180 top
TP45 "Test point" PAD_80D_052H 14680,3000 r180 top
TP46 "Test point" PAD_80D_052H 14414,3000 r180 top
TP47 "Test point" PAD_80D_052H 15860,3600 r90 top
TP48 "Test point" PAD_80D_052H 16199,3000 r90 top
TP49 "Test point" PAD_80D_052H 15689,3000 r90 top
TP50 "Test point" PAD_80D_052H 5400,2200 r90 top
TP51 "Test point" PAD_80D_052H 5400,1900 r90 top
TP52 "Test point" PAD_80D_052H 5400,1600 r90 top
TP53 "Test point" PAD_80D_052H 5400,1300 r90 top
TP54 "Test point" PAD_80D_052H 4860,7800 r0 top
TP55 "Test point" PAD_80D_052H 3420,7800 r0 top
TP56 "Test point" PAD_80D_052H 1400,7800 r0 top
TP57 "Test point" PAD_80D_052H 1700,7800 r0 top
TP58 "Test point" PAD_80D_052H 13800,7600 r0 top
TP59 "Test point" PAD_80D_052H 13200,7600 r0 top
TP60 "Test point" PAD_80D_052H 2020,7800 r0 top
TP61 "Test point" PAD_80D_052H 13000,7600 r0 top
TP62 "Test point" PAD_80D_052H 16320,4200 r90 top
TP109 "Test point" PAD_80D_052H 200,6420 r90 top
TP110 "Test point" PAD_80D_052H 200,6600 r90 top
TP111 "Test point" PAD_80D_052H 200,6800 r90 top
TP112 "Test point" PAD_80D_052H 200,7000 r90 top
TP113 "Test point" PAD_80D_052H 200,7200 r90 top
TP114 "Test point" PAD_80D_052H 7820,7700 r90 top
TP115 "Test point" PAD_80D_052H 220,5420 r90 top
TP116 "Test point" PAD_80D_052H 1600,600 r90 top
TP117 "Test point" PAD_80D_052H 5660,360 r90 top
TP118 "Test point" PAD_80D_052H 200,6200 r90 top
TP119 "Test point" PAD_80D_052H 200,4800 r90 top
U1 "74AC00PC" N14A 1800,7260 r270 top
U2 "LT1124ACN8" N8 3115,7561 r270 top
U3 "DM74ALS74AN" N14A 1200,7260 r270 top
U4 "DG642" 182H_M 3940,7420 r0 top
U15 "REF02AU" 182H_N 2435,7461 r0 top

## Footprints (in the part's own frame and the unit in brackets; to place one, negate y for a bottom-side part, rotate by r counter-clockwise, add the part's x,y. Pads: shape width x height; smd on the part's side, far side on the other; paste and mask are expansions set on the pad)
182H_M [mm] "8-Pin Small Outline Integrated Circuit 1.27 mm Pitch, IPC Low Density"
  oval 2.5x0.7 smd: 1(-2.45,1.905) 2(-2.45,0.635) 3(-2.45,-0.635) 4(-2.45,-1.905) 5(2.45,-1.905) 6(2.45,-0.635) 7(2.45,0.635) 8(2.45,1.905)
  silkscreen extent -2.57,-2.5 0.8,2.93, body extent -2,-2.5 2,2.5, height 1.75
182H_N [mm] "8-Pin Small Outline Integrated Circuit 1.27 mm Pitch, IPC Medium Density"
  oval 2.2x0.6 smd: 1(-2.4,1.905) 2(-2.4,0.635) 3(-2.4,-0.635) 4(-2.4,-1.905) 5(2.4,-1.905) 6(2.4,-0.635) 7(2.4,0.635) 8(2.4,1.905)
  silkscreen extent -2.52,-2.5 0.9,2.88, body extent -1.95,-2.45 1.95,2.45, height 1.75
DIP-16 [mm] "DIP; 16 Leads; Row Spacing 7.62 mm; Pitch 2.54 mm"
  rect 1.5x1.5 hole 0.9: 1(-8.89,-3.81)
  round 1.5 hole 0.9: 2(-6.35,-3.81) 3(-3.81,-3.81) 4(-1.27,-3.81) 5(1.27,-3.81) 6(3.81,-3.81) 7(6.35,-3.81) 8(8.89,-3.81) 9(8.89,3.81) 10(6.35,3.81) 11(3.81,3.81) 12(1.27,3.81) 13(-1.27,3.81) 14(-3.81,3.81) 15(-6.35,3.81) 16(-8.89,3.81)
  silkscreen extent -10.3,-2.65 10.3,2.65
DO-35 [mm] "Diode, Axial; Body 3.8 x 1.9 mm (LxDia. max), Lead Dia. 0.53 mm (max)"
  round 1.5 hole 0.9: 1(-3.55,0)
  rect 1.5x1.5 hole 0.9: 2(3.55,0)
  silkscreen extent -1.95,-0.95 2.05,0.95
"DSUB37 RT FEM" [mm] "Connector; D Subminiature; 37 Position; Right Angle; Pitch 1.385 mm"
  rect 1.69x1.69 hole 1.09: 1(0,0)
  round 1.69 hole 1.09: 2(2.761,0) 3(5.522,0) 4(8.283,0) 5(11.044,0) 6(13.805,0) 7(16.566,0) 8(19.327,0) 9(22.088,0) 10(24.849,0) 11(27.61,0) 12(30.371,0) 13(33.132,0) 14(35.901,0) 15(38.669,0) 16(41.438,0) 17(44.206,0) 18(46.975,0) 19(49.744,0) 20(1.38,2.84) 21(4.149,2.84) 22(6.918,2.84) 23(9.686,2.84) 24(12.455,2.84) 25(15.223,2.84) 26(17.992,2.84) 27(20.761,2.84) 28(23.529,2.84) 29(26.298,2.84) 30(29.066,2.84) 31(31.835,2.84) 32(34.604,2.84) 33(37.372,2.84) 34(40.141,2.84) 35(42.909,2.84) 36(45.678,2.84) 37(48.447,2.84)
  round 4.76 hole 3.26: 38(-6.96,1.42) 39(56.704,1.42)
  silkscreen extent -9.93,-1.58 59.78,16.92
HDR1X2 [mm] "Connector; Header; 2 Position"
  rect 1.5x1.5 hole 0.9: 1(0,0)
  round 1.5 hole 0.9: 2(2.54,0)
  silkscreen extent -1.27,-1.27 3.81,1.27
HDR1X3 [mm] "Connector; Header; 3 Position"
  rect 1.5x1.5 hole 0.9: 1(0,0)
  round 1.5 hole 0.9: 2(2.54,0) 3(5.08,0)
  silkscreen extent -1.27,-1.27 6.35,1.27
"HDR1X4 for IDC" [mm] "Connector; Header; 4 Position"
  rect 1.5x1.5 hole 0.9: 1(0,0)
  round 1.5 hole 0.9: 2(2.54,0) 3(5.08,0) 4(7.62,0)
  silkscreen extent -1.4,-2.54 8.89,2.54
"HDR1X6 for IDC" [mm] "Connector; Header; 6 Position"
  rect 1.5x1.5 hole 0.9: 1(0,0)
  round 1.5 hole 0.9: 2(2.54,0) 3(5.08,0) 4(7.62,0) 5(10.16,0) 6(12.7,0)
  silkscreen extent -1.4,-2.54 13.97,2.54
"HDR 1x12 PHX" [mm] "PHOENIX MCV 1,5/12-G-3,81"
  rect 2.2x2.2 hole 1.2: 1(20.955,0)
  round 2.2 hole 1.2: 2(17.145,0) 3(13.335,0) 4(9.525,0) 5(5.715,0) 6(1.905,0) 7(-1.905,0) 8(-5.715,0) 9(-9.525,0) 10(-13.335,0) 11(-17.145,0) 12(-20.955,0)
  silkscreen extent -23.5,-5.9 23.6,6.4
"LCOGT LOGO TOP" [mil]
  Top Layer (*.GTL) circle w5: c20,0 r67
  Top Layer (*.GTL) lines w5: -47,0 87,0 ; -34,-39 74,-39 ; -34,39 74,39 ; 11,-65 cw(c61.7,-14.3) -10,-14.3 -10,0 -10,14.3 cw(c61.7,14.3) 11,65 ; 20,-67 20,67 23,67 ; 29,-65 ccw(c-21.7,-14.3) 50,-14.3 50,0 50,14.3 ccw(c-21.7,14.3) 29,65
  Top Layer (*.GTL) keep-out lines w5: -250,-30 ccw(c-220,-30) -220,-60 -60,-60 ccw(c20,0) 100,-60 190,-60 ccw(c190,-30) 220,-30 220,30 ccw(c190,30) 190,60 100,60 ccw(c20,0) -60,60 -210,60 ccw(c-210,20) -250,20 -250,0 -250,-30
MMCX2.54-V5 [mm] "Connector; RF Coaxial, MMCX, Thru-Hole; 5 Position; Vertical"
  round 1.4 hole 0.85: 1(0,0) 2(-1.27,-1.27) 3(1.27,-1.27) 4(1.27,1.27) 5(-1.27,1.27)
  silkscreen extent -1.75,-1.75 1.75,1.75
N8 [mm] "DIP, Plastic; 8 Leads; Row Spacing 7.62 mm; Pitch 2.54 mm"
  rect 1.5x1.5 hole 0.9: 1(-3.81,-3.81)
  round 1.5 hole 0.9: 2(-1.27,-3.81) 3(1.27,-3.81) 4(3.81,-3.81) 5(3.81,3.81) 6(1.27,3.81) 7(-1.27,3.81) 8(-3.81,3.81)
  silkscreen extent -5.15,-2.65 5.15,2.65
N14A [mm] "DIP; 14 Leads; Row Spacing 7.62 mm; Pitch 2.54 mm"
  rect 1.5x1.5 hole 0.9: 1(-7.62,-3.81)
  round 1.5 hole 0.9: 2(-5.08,-3.81) 3(-2.54,-3.81) 4(0,-3.81) 5(2.54,-3.81) 6(5.08,-3.81) 7(7.62,-3.81) 8(7.62,3.81) 9(5.08,3.81) 10(2.54,3.81) 11(0,3.81) 12(-2.54,3.81) 13(-5.08,3.81) 14(-7.62,3.81)
  silkscreen extent -9.85,-2.65 9.85,2.65
PAD_80D_052H [mil]
  round 80 hole 52: 1(0,0)
"POT, BOURNS 3266W" [mil]
  round 45 hole 25: 1(0,-100) 2(100,0) 3(200,-100)
  silkscreen extent -40,-140 240,40
"QFS SMD PWR PINS"#1 [mm] "78 pos (156 pin) + 8 pwr pins"
  rect 0.4x2.15 smd mask+0: 1(-29.28,3.24) 2(-29.28,-3.24) 3(-28.645,3.24) 4(-28.645,-3.24) 5(-28.01,3.24) 6(-28.01,-3.24) 7(-27.375,3.24) 8(-27.375,-3.24) 9(-26.74,3.24) 10(-26.74,-3.24) 11(-26.105,3.24) 12(-26.105,-3.24) 13(-25.47,3.24) 14(-25.47,-3.24) 15(-24.835,3.24) 16(-24.835,-3.24) 17(-24.2,3.24) 18(-24.2,-3.24) 19(-23.565,3.24) 20(-23.565,-3.24) 21(-22.93,3.24) 22(-22.93,-3.24) 23(-22.295,3.24) 24(-22.295,-3.24) 25(-21.66,3.24) 26(-21.66,-3.24) 27(-21.025,3.24) 28(-21.025,-3.24) 29(-20.39,3.24) 30(-20.39,-3.24) 31(-19.755,3.24) 32(-19.755,-3.24) 33(-19.12,3.24) 34(-19.12,-3.24) 35(-18.485,3.24) 36(-18.485,-3.24) 37(-17.85,3.24) 38(-17.85,-3.24) 39(-17.215,3.24) 40(-17.215,-3.24) 41(-16.58,3.24) 42(-16.58,-3.24) 43(-15.945,3.24) 44(-15.945,-3.24) 45(-15.31,3.24) 46(-15.31,-3.24) 47(-14.675,3.24) 48(-14.675,-3.24) 49(-14.04,3.24) 50(-14.04,-3.24) 51(-13.405,3.24) 52(-13.405,-3.24) 53(-7.94,3.24) 54(-7.94,-3.24) 55(-7.305,3.24) 56(-7.305,-3.24) 57(-6.67,3.24) 58(-6.67,-3.24) 59(-6.035,3.24) 60(-6.035,-3.24) 61(-5.4,3.24) 62(-5.4,-3.24) 63(-4.765,3.24) 64(-4.765,-3.24) 65(-4.13,3.24) 66(-4.13,-3.24) 67(-3.495,3.24) 68(-3.495,-3.24) 69(-2.86,3.24) 70(-2.86,-3.24) 71(-2.225,3.24) 72(-2.225,-3.24) 73(-1.59,3.24) 74(-1.59,-3.24) 75(-0.955,3.24) 76(-0.955,-3.24) 77(-0.32,3.24) 78(-0.32,-3.24) 79(0.315,3.24) 80(0.315,-3.24) 81(0.95,3.24) 82(0.95,-3.24) 83(1.585,3.24) 84(1.585,-3.24) 85(2.22,3.24) 86(2.22,-3.24) 87(2.855,3.24) 88(2.855,-3.24) 89(3.49,3.24) 90(3.49,-3.24) 91(4.125,3.24) 92(4.125,-3.24) 93(4.76,3.24) 94(4.76,-3.24) 95(5.395,3.24) 96(5.395,-3.24) 97(6.03,3.24) 98(6.03,-3.24) 99(6.665,3.24) 100(6.665,-3.24) 101(7.3,3.24) 102(7.3,-3.24) 103(7.935,3.24) 104(7.935,-3.24) 105(13.4,3.24) 106(13.4,-3.24) 107(14.035,3.24) 108(14.035,-3.24) 109(14.67,3.24) 110(14.67,-3.24) 111(15.305,3.24) 112(15.305,-3.24) 113(15.94,3.24) 114(15.94,-3.24) 115(16.575,3.24) 116(16.575,-3.24) 117(17.21,3.24) 118(17.21,-3.24) 119(17.845,3.24) 120(17.845,-3.24) 121(18.48,3.24) 122(18.48,-3.24) 123(19.115,3.24) 124(19.115,-3.24) 125(19.75,3.24) 126(19.75,-3.24) 127(20.385,3.24) 128(20.385,-3.24) 129(21.02,3.24) 130(21.02,-3.24) 131(21.655,3.24) 132(21.655,-3.24) 133(22.29,3.24) 134(22.29,-3.24) 135(22.925,3.24) 136(22.925,-3.24) 137(23.56,3.24) 138(23.56,-3.24) 139(24.195,3.24) 140(24.195,-3.24) 141(24.83,3.24) 142(24.83,-3.24) 143(25.465,3.24) 144(25.465,-3.24) 145(26.1,3.24) 146(26.1,-3.24) 147(26.735,3.24) 148(26.735,-3.24) 149(27.37,3.24) 150(27.37,-3.24) 151(28.005,3.24) 152(28.005,-3.24) 153(28.64,3.24) 154(28.64,-3.24) 155(29.275,3.24) 156(29.275,-3.24)
  rect 18x0.5 smd mask+0: 157(-21.34,0) 158(0,0) 159(21.34,0)
  round 1.27 hole 0.635 mask+0: PC01(-36.703,1.27) PC02(-36.703,-1.27) PC03(-34.671,1.27) PC04(-34.684,-1.27) PC05(34.671,1.27) PC06(34.671,-1.27) PC07(36.703,1.27) PC08(36.703,-1.27)
  silkscreen extent -38.16,-4.32 38.15,4.65
"QFS SMD PWR PINS"#2 [mm] "78 pos (156 pin) + 8 pwr pins"
  rect 0.4x2.15 smd mask+0: 1(-29.28,3.24) 2(-29.28,-3.24) 3(-28.645,3.24) 4(-28.645,-3.24) 5(-28.01,3.24) 6(-28.01,-3.24) 7(-27.375,3.24) 8(-27.375,-3.24) 9(-26.74,3.24) 10(-26.74,-3.24) 11(-26.105,3.24) 12(-26.105,-3.24) 13(-25.47,3.24) 14(-25.47,-3.24) 15(-24.835,3.24) 16(-24.835,-3.24) 17(-24.2,3.24) 18(-24.2,-3.24) 19(-23.565,3.24) 20(-23.565,-3.24) 21(-22.93,3.24) 22(-22.93,-3.24) 23(-22.295,3.24) 24(-22.295,-3.24) 25(-21.66,3.24) 26(-21.66,-3.24) 27(-21.025,3.24) 28(-21.025,-3.24) 29(-20.39,3.24) 30(-20.39,-3.24) 31(-19.755,3.24) 32(-19.755,-3.24) 33(-19.12,3.24) 34(-19.12,-3.24) 35(-18.485,3.24) 36(-18.485,-3.24) 37(-17.85,3.24) 38(-17.85,-3.24) 39(-17.215,3.24) 40(-17.215,-3.24) 41(-16.58,3.24) 42(-16.58,-3.24) 43(-15.945,3.24) 44(-15.945,-3.24) 45(-15.31,3.24) 46(-15.31,-3.24) 47(-14.675,3.24) 48(-14.675,-3.24) 50(-14.04,-3.24) 51(-13.405,3.24) 52(-13.405,-3.24) 53(-7.94,3.24) 54(-7.94,-3.24) 55(-7.305,3.24) 56(-7.305,-3.24) 57(-6.67,3.24) 58(-6.67,-3.24) 59(-6.035,3.24) 60(-6.035,-3.24) 61(-5.4,3.24) 62(-5.4,-3.24) 63(-4.765,3.24) 64(-4.765,-3.24) 65(-4.13,3.24) 66(-4.13,-3.24) 67(-3.495,3.24) 68(-3.495,-3.24) 69(-2.86,3.24) 70(-2.86,-3.24) 71(-2.225,3.24) 72(-2.225,-3.24) 73(-1.59,3.24) 74(-1.59,-3.24) 75(-0.955,3.24) 76(-0.955,-3.24) 77(-0.32,3.24) 78(-0.32,-3.24) 79(0.315,3.24) 80(0.315,-3.24) 81(0.95,3.24) 82(0.95,-3.24) 83(1.585,3.24) 84(1.585,-3.24) 85(2.22,3.24) 86(2.22,-3.24) 87(2.855,3.24) 88(2.855,-3.24) 89(3.49,3.24) 90(3.49,-3.24) 91(4.125,3.24) 92(4.125,-3.24) 93(4.76,3.24) 94(4.76,-3.24) 95(5.395,3.24) 96(5.395,-3.24) 97(6.03,3.24) 98(6.03,-3.24) 99(6.665,3.24) 100(6.665,-3.24) 101(7.3,3.24) 102(7.3,-3.24) 103(7.935,3.24) 104(7.935,-3.24) 105(13.4,3.24) 106(13.4,-3.24) 107(14.035,3.24) 108(14.035,-3.24) 109(14.67,3.24) 110(14.67,-3.24) 111(15.305,3.24) 112(15.305,-3.24) 113(15.94,3.24) 114(15.94,-3.24) 115(16.575,3.24) 116(16.575,-3.24) 117(17.21,3.24) 118(17.21,-3.24) 119(17.845,3.24) 120(17.845,-3.24) 121(18.48,3.24) 122(18.48,-3.24) 123(19.115,3.24) 124(19.115,-3.24) 125(19.75,3.24) 126(19.75,-3.24) 127(20.385,3.24) 128(20.385,-3.24) 129(21.02,3.24) 130(21.02,-3.24) 131(21.655,3.24) 132(21.655,-3.24) 133(22.29,3.24) 134(22.29,-3.24) 135(22.925,3.24) 136(22.925,-3.24) 137(23.56,3.24) 138(23.56,-3.24) 139(24.195,3.24) 140(24.195,-3.24) 141(24.83,3.24) 142(24.83,-3.24) 143(25.465,3.24) 144(25.465,-3.24) 145(26.1,3.24) 146(26.1,-3.24) 147(26.735,3.24) 148(26.735,-3.24) 149(27.37,3.24) 150(27.37,-3.24) 151(28.005,3.24) 152(28.005,-3.24) 153(28.64,3.24) 154(28.64,-3.24) 155(29.275,3.24) 156(29.275,-3.24)
  rect 0.4x2.15 smd: 49(-14.04,3.24)
  rect 18x0.5 smd mask+0: 157(-21.34,0) 158(0,0) 159(21.34,0)
  round 1.27 hole 0.635 mask+0: PC01(-36.703,1.27) PC02(-36.703,-1.27) PC03(-34.671,1.27) PC04(-34.684,-1.27) PC05(34.671,1.27) PC06(34.671,-1.27) PC07(36.703,1.27) PC08(36.703,-1.27)
  silkscreen extent -38.16,-4.32 38.15,4.65
RAD-0.1 [mm] "Indicating Instrument; 2 Leads"
  round 1.2 hole 0.7: 1(-1.27,0) 2(1.27,0)
  silkscreen extent -2.54,-1.27 2.54,1.27
SMD_0805 [mil]
  rect 50x50 smd: 1(-45,0) 2(45,0)
  silkscreen extent -1,-1 1,1
SMD_0805_LED [mil]
  rect 50x50 smd: ANOD(-45,0) CATH(45,0)
  silkscreen extent -60,40 60,70
SMD_CAP_3216 [mil]
  rect 78x48 smd: 1(55,0) 2(-55,0)
  silkscreen extent -108,-65 134,38
SMD_CAP_6032 [mil]
  rect 100x100 smd: NEG(-115,0) POS(115,0)
  silkscreen extent -179,-110 195,64
SOT23 [mm] "SOT-23; 3 Leads; Body 3.1 x 2.5 mm, inc. leads (LxW max), Alternate Lead Configuration"
  rect 0.9x0.95 smd: 1(0,1.175) 2(0.95,-1.175) 3(-0.95,-1.175)
  silkscreen extent -1.3,-0.3 1.3,2.32
"TARGET MECHANICAL 5" [mil]
"TO-92A OFFSET" [mm] "TO, Flat Index; 3 In-Line, Axial Leads; Body Dia. 4.5mm; Leads 0.51 x 0.48 mm (max)"
  oval 2x1 hole 0.9 mask+0.051: 1(0,-1.27) 2(-1.016,0) 3(0,1.27)
  silkscreen extent -2.48,-2.48 1.5,2.48

## Part data
C1A C1B C1C C2A C2B C2C C3A C3B C3C C4A C4B C4C C5A C5B C5C C6A C6B C6C C7A C7B C7C C8A C8B C8C C9A C9B C9C C10A C10B C10C C11A C11B C11C C12A C12B C12C C13A C13B C13C C14A C14B C14C C15A C15B C15C C16A C16B C16C C17A C17B C17C C18A C18B C18C C19A C19B C19C C58 C69 C70 C71: "Capacitor"
C81: library part "Cap Tant 35V", "outline 6.0mm x 3.2mm"
C82 C83 C84 C85 C86: library part "Cap Tant 15V", "outline 3.2mm x 1.6mm"
D1 D2: "High Conductance Fast Diode"
D3 D4 D5 D6 D7 D8: "Typical BLUE SiC LED"
J1 J3 J4 J5 J6: library part "Header 12 SCREW", "Phoenix MCV series"
J2: "Header, 3-Pin"
J7: "Header, 6-Pin"
J8 J11: "Header, 4-Pin"
J9: "Header, 2-Pin"
J10: "Receptacle Assembly, 37 Position, Right Angle"
P1A P1B P1C P2 P3A P3B P3C P4 P6 P7: "SAMTEC QFSS W/PWR PINS"
P5 P15: "RF Coaxial PCB Connector, MMCX; Thru-Hole, Vertical Mount Plug,  50 Ohm Impedance"
Q1 Q2: "PNP SOT23"
Q3A Q3B Q3C Q4A Q4B Q4C Q5A Q5B Q5C Q6A Q6B Q6C: "N-JFET SWITCH 35V"
R1 R2 R3 R4 R5 R6: "Resistor"
R7 R8 R9 R10 R11: library part "Res SMD", "Resistor 0805"
RT1 RT2: "TH Pot Bourns 3266W"
SW1: "SW-DIP 4-pos SPDT"
TP1A TP1B TP1C TP2A TP2B TP2C TP3A TP3B TP3C TP4A TP4B TP4C TP5A TP5B TP5C TP6A TP6B TP6C TP7A TP7B TP7C TP8A TP8B TP8C TP9A TP9B TP9C TP10A TP10B TP10C TP11A TP11B TP11C TP12A TP12B TP12C TP13A TP13B TP13C TP14A TP14B TP14C TP15A TP15B TP15C TP16A TP16B TP16C TP17A TP17B TP17C TP18A TP18B TP18C TP19 TP20 TP21 TP22 TP23A TP23B TP23C TP24A TP24B TP24C TP25A TP25B TP25C TP26A TP26B TP26C TP27A TP27B TP27C TP28A TP28B TP28C TP29A TP29B TP29C TP30A TP30B TP30C TP31A TP31B TP31C TP32 TP33 TP34 TP35 TP36 TP37 TP38 TP39 TP40 TP41 TP42 TP43 TP44 TP45 TP46 TP47 TP48 TP49 TP50 TP51 TP52 TP53 TP54 TP55 TP56 TP57 TP58 TP59 TP60 TP61 TP62 TP109 TP110 TP111 TP112 TP113 TP114 TP115 TP116 TP117 TP118 TP119: "Test Point"
U1: "Quad 2-Input NAND Gate"
U2: "Dual Low Noise, High-Speed Precision Operational Amplifier"
U3: "Dual D-Type Positive-Edge-Triggered Flip-Flop with Preset and Clear"
U15: "+5V Precision Voltage Reference"

## Free pads (board coordinates)
  round 250 hole 125: 0(600,600) 0(16400,600) 1(6200,600) 3(10500,600) 4(9300,4800) 5(4000,4200) 6(1100,6600) 7(7600,7400) 8(12600,7400) 9(14900,7600)

## Via types
v1: diameter 24, hole 10, Top Layer (*.GTL) to Bottom Layer (*.GBL), 662 vias
v2: diameter 10, hole 10, Top Layer (*.GTL) to Bottom Layer (*.GBL), 1 vias

## Nets (pads, with @x,y where several pads share a name; then routed paths per layer and width w, separated by ;. In a path a pad name is that pad's centre, name@x,y a point inside that pad or via, vN(x,y) a via of type N, cw(c..) or ccw(c..) an arc to the next point about the centre after c; other vN are vias at no path point)
+5ANA: C84.1 J7.4 P1A.PC03 P1B.PC03 P1C.PC03 P3A.PC03 P3B.PC03 P3C.PC03 P4.PC03 P6.PC03 P7.PC03 TP110.1 U4.7 | length 31562.7
  Top Layer (*.GTL) w10: U4.7@4036.46,7445 v1(4112,7445)
  Top Layer (*.GTL) w25: C84.1@300,7575 300,7608 400,7708 J7.4@400,7800
  MidLayer2 (*.G2) w10: v1(400,7094) 427.47,7121.47 4036.47,7121.47 4137,7222 4137,7420 v1(4112,7445)
  MidLayer2 (*.G2) w50: TP110.1@200,6600 v1(400,6600) ; v1(463,3530) 473.98,3519.02 P1A.PC03@777.96,3519.02 1142.94,3884 v1(1838,3884) 2144.76,3884 2168.02,3907.26 2726.98,3907.26 2741.24,3893 3380.28,3893 3413.36,3859.91 ; v1(3476,3921) 3414.91,3859.91 3413.36,3859.91 ; v1(4446,3936) 4446,3818.26 4443,3815.26 ; v1(7514,5918) 7679,5918 7833,6072 8402.98,6072 8479.21,5995.77 9157.77,5995.77 9160,5998 ; v1(9161,6051) 9160,6050 9160,5998 ; v1(10489,6053) 10491,6055 10491,6140 ; P6.PC03@11277.96,6249.02 11277.96,6238.96 11179,6140 10491,6140 ; v1(12759,3819) 12667.98,3819 12634.98,3852 12601.02,3852 12575.34,3826.32 12048.01,3826.32 11994.14,3772.46 11268.02,3772.46 11258.56,3763 10630.02,3763 10619.02,3774 v1(7769,3774) 7767.46,3772.46 7368.02,3772.46 7294.56,3699 5426,3699 5309.74,3815.26 4443,3815.26 ; 3413.36,3859.91 3458.02,3815.26 4443,3815.26 ; 9160,5998 9635.02,5998 9716.02,6079 10186.98,6079 10215.98,6050 10270.52,6050 10273.02,6047.5 10311.98,6047.5 10404.48,6140 10491,6140
  MidLayer3 (*.G3) w50: J7.4@400,7800 400,5556 451,5505 451,4395.51 464.57,4381.94 464.57,3741.61 463,3740.03 v1(463,3530) ; v1(1838,3884) 2077.96,3644.04 P1B.PC03@2077.96,3519.02 ; P1C.PC03@3377.96,3519.02 3377.96,3822.96 v1(3476,3921) ; v1(4446,3936) 4677.96,3704.04 P7.PC03@4677.96,3519.02 ; P3A.PC03@7377.96,6249.02 7460,6166.98 7460,5972 v1(7514,5918) 7595,5837 7678,5837 7771,5744 7771,3960.98 7758,3947.98 7758,3914.02 7769,3903.02 v1(7769,3774) ; P3B.PC03@8677.96,6249.02 8779.98,6249.02 8872,6157 8872,6100.98 8925.48,6047.5 9157.5,6047.5 v1(9161,6051) ; P3C.PC03@9977.96,6249.02 9985.94,6257 10447,6257 10489,6215 v1(10489,6053) ; v1(12759,3819) 12759,3537.98 P4.PC03@12777.96,3519.02
+12V: C69.2 C82.1 J7.2 P1A.PC01 P1B.PC01 P1C.PC01 P3A.PC01 P3B.PC01 P3C.PC01 P4.PC01 P6.PC01 P7.PC01 R7.1 TP112.1 U2.8 U15.2 | length 33150.8
  Top Layer (*.GTL) w10: v1(2269,7486) U15.2@2340.51,7486 ; R7.1@14005,7600 v1(14005,7668)
  Top Layer (*.GTL) w25: C82.1@580,7575 580,7659 600,7679 J7.2@600,7800
  MidLayer2 (*.G2) w10: v1(608.5,7410) 608.5,7411.5 600,7420 601.47,7421.47 1965.96,7421.47 2030.49,7486 v1(2269,7486) 2623.87,7486 2681.49,7543.62 2843.14,7543.62 2949.04,7649.53 3203.53,7649.53 U2.8@3265,7711 3265,7776 3200,7841 C69.2@3165,7841
  MidLayer2 (*.G2) w50: TP112.1@200,7000 606,7000 v1(607,6999) ; P1A.PC01@777.96,3439.02 777.96,3301.96 775,3299 2077,3299 ; P1B.PC01@2077.96,3439.02 2077.96,3299.96 2077,3299 ; P1C.PC01@3377.96,3439.02 3377.96,3300.96 3376,3299 ; P7.PC01@4677.96,3439.02 4677.96,3221.96 4674,3218 ; P3A.PC01@7377.96,6329.02 7377.96,6377.96 7523,6523 v1(7923,6523) 8683,6523 ; P3B.PC01@8677.96,6329.02 8677.96,6517.96 8683,6523 ; P3C.PC01@9977.96,6329.02 9977.96,6522.04 9977,6523 ; P6.PC01@11277.96,6329.02 11277.96,6521.04 11276,6523 ; v1(12780,3083) 12778.71,3081.71 12048.01,3081.71 11911.72,3218 4674,3218 ; v1(14005,7668) 14013,7660 v1(14013,6576) ; v1@14012.68,6576.32 12098.01,6576.32 12044.69,6523 11276,6523 ; 2077,3299 3376,3299 ; 3376,3299 4375.02,3299 4456.02,3218 4674,3218 ; 8683,6523 9977,6523 ; 9977,6523 11276,6523
  MidLayer3 (*.G3) w50: J7.2@600,7800 600,7363.98 622,7341.98 622,6797 539,6714 539,5634 681,5492 681,3493 734.98,3439.02 P1A.PC01@777.96,3439.02 ; v1(7918,3218) 7923,3223 v1(7923,6523) ; P4.PC01@12777.96,3439.02 12780,3436.98 v1(12780,3083)
+28V: C81.POS J7.1 P1A.PC05 P1B.PC05 P1C.PC05 P3A.PC05 P3B.PC05 P3C.PC05 P4.PC05 P6.PC05 P7.PC05 Q3A.1 Q3B.1 Q3C.1 Q4A.1 Q4B.1 Q4C.1 Q5A.1 Q5B.1 Q5C.1 Q6A.1 Q6B.1 Q6C.1 R3.2 R5.2 TP113.1 | length 28719.5
  Top Layer (*.GTL) w10: v1(4483,7484) 4484,7485 R5.2@4540,7485 ; v1(4495,7687) 4497,7685 R3.2@4540,7685
  Top Layer (*.GTL) w25: J7.1@700,7800 700,7713 740,7673 C81.POS@740,7555
  MidLayer2 (*.G2) w10: v1(4483,7484) 4483,7556.5 4495,7568.5 v1(4495,7687)
  MidLayer2 (*.G2) w50: TP113.1@200,7200 698,7200 v1(700,7198) ; Q6A.1@356.2,4411.77 411.43,4467 645.98,4467 701.21,4411.77 Q6B.1@1656.2,4411.77 1879.25,4411.77 1915.02,4376 2136.76,4376 2166.73,4405.98 2951.87,4405.98 2956.2,4410.31 Q6C.1@2956.2,4411.77 ; P1A.PC05@777.96,6249.02 777.96,6176.96 823.92,6131 v1(1657,6131) v1(4486,6131) 4677,6131 4677.96,6131.96 P7.PC05@4677.96,6249.02 ; 2077.96,6133.96 P1B.PC05@2077.96,6249.02 ; Q3C.1@2956.2,3511.77 3294.35,3511.77 3355.59,3573.02 4956.62,3573.02 4958.63,3571 5953.58,3571 5955.59,3573.02 6099.83,3573.02 6104.8,3568.04 7250.62,3568.04 7255.59,3573.02 7300.33,3573.02 7305.3,3568.04 8550.62,3568.04 8555.59,3573.02 8600.33,3573.02 8605.3,3568.04 9850.62,3568.04 9855.59,3573.02 9900.33,3573.02 9905.3,3568.04 11070.04,3568.04 11075.02,3573.02 11200.33,3573.02 11205.3,3568.04 11236.96,3568.04 11277.96,3527.04 P6.PC05@11277.96,3519.02 12040.7,3519.02 12048.01,3526.32 12107.91,3526.32 12132.23,3502 v1(12567,3502) ; 3377.96,6132.96 P1C.PC05@3377.96,6249.02
  MidLayer3 (*.G3) w10: v1(4483,7484) 4483,6134 v1(4486,6131)
  MidLayer3 (*.G3) w50: Q3A.1@356.2,3511.77 356.2,3623.24 287.83,3691.61 287.83,3741.94 356.2,3810.31 356.2,3923.24 287.83,3991.61 287.83,4041.94 356.2,4110.31 356.2,4223.24 287.83,4291.61 287.83,4341.94 356.2,4410.31 Q6A.1@356.2,4411.77 ; v1@694,7200 v1@700,7206 ; J7.1@700,7800 v1@700,7206 ; P1A.PC05@777.96,6249.02 769.98,6257 700,6257 v1@700,7206 ; Q3B.1@1656.2,3511.77 1656.2,3623.24 1587.83,3691.61 1587.83,3741.94 1656.2,3810.31 1656.2,3923.24 1587.83,3991.61 1587.83,4041.94 1656.2,4110.31 1656.2,4223.24 1587.83,4291.61 1587.83,4341.94 1656.2,4410.31 Q6B.1@1656.2,4411.77 1656.2,6130.2 v1(1657,6131) ; Q3C.1@2956.2,3511.77 2828,3639.98 2828,3703 2936.77,3811.77 Q4C.1@2956.2,3811.77 2840,3927.98 2840,4037 2869,4066 2910.43,4066 Q5C.1@2956.2,4111.77 2956.2,4223.24 2862,4317.44 2862,4381.96 2886.02,4405.98 2951.87,4405.98 2956.2,4410.31 Q6C.1@2956.2,4411.77 ; v1(12567,3502) 12567,3662.02 12659,3754.02 12659,5976 12666,5983 12666,6137.06 P4.PC05@12777.96,6249.02
-5ANA: C85.2 J7.5 P1A.PC04 P1B.PC04 P1C.PC04 P3A.PC04 P3B.PC04 P3C.PC04 P4.PC04 P6.PC04 P7.PC04 TP109.1 U4.3 | length 29418.1
  Top Layer (*.GTL) w10: v1(3756,7395) U4.3@3843.54,7395
  Top Layer (*.GTL) w25: C85.2@180,7575 180,7618 300,7738 J7.5@300,7800
  MidLayer2 (*.G2) w10: v1(307,7130) 342,7165 684.92,7165 685.92,7164 714.08,7164 771.56,7221.47 3151.61,7221.47 3197.62,7267.49 3197.62,7289.14 3303.49,7395 v1(3756,7395)
  MidLayer2 (*.G2) w50: v1(373,4638) 1127,4638 v1(1129,4640) ; v2(877,3520) 977,3620 1287.02,3620 1323.02,3584 2176,3584 ; P1B.PC04@2177.96,3518.52 2177.96,3582.04 2176,3584 ; v1(3683,3723) 3684,3722 3684,3659 ; v1(4981,3625) 4981,3754 4980,3755 ; P3A.PC04@7277.96,6249.52 7267,6238.56 7267,6083 7269,6081 7529.02,6081 7532.02,6084 7565.98,6084 7567.98,6082 7675.98,6082 7765.98,6172 8128,6172 ; v1(8044,6289) 8103,6289 8124,6268 8124,6176 8128,6172 ; P3B.PC04@8577.96,6249.52 8577.96,6172.04 8578,6172 ; P3C.PC04@9877.96,6249.52 9877.96,6173.96 9877,6173 ; P6.PC04@11177.96,6249.52 11173.94,6245.5 10297.52,6245.5 10225.02,6173 9877,6173 ; P4.PC04@12877.96,3518.52 12877.96,3622.04 12162.19,3622.04 12107.91,3676.32 12048.01,3676.32 11993.73,3622.04 11227.67,3622.04 11222.7,3627.02 11052.65,3627.02 11047.67,3622.04 9927.67,3622.04 9922.7,3627.02 9833.23,3627.02 9828.25,3622.04 8627.67,3622.04 8622.7,3627.02 8533.23,3627.02 8528.25,3622.04 v1(8043,3622.04) 7327.67,3622.04 7322.7,3627.02 7233.23,3627.02 7228.25,3622.04 7205.29,3645 5403.63,3645 5293.63,3755 4980,3755 ; 2176,3584 3181,3584 3256,3659 3684,3659 ; 3684,3659 4386.98,3659 4394,3651.98 4734,3651.98 4837.02,3755 4980,3755 ; 8128,6172 8578,6172 ; 8578,6172 8924.02,6172 8997.52,6245.5 9034.98,6245.5 9107.48,6173 9877,6173
  MidLayer3 (*.G3) w25: v2(877,3520) 877,3519.48 P1A.PC04@877.96,3518.52
  MidLayer3 (*.G3) w50: TP109.1@200,6420 201,6419 307,6419 ; J7.5@300,7800 300,7382.98 341,7341.98 341,7308.02 307,7274.02 307,5530.58 369,5468.58 369,4926 375,4920 375,4640 v1(373,4638) ; v1(1129,4640) 1129,3622 v1(1131,3620) ; P1C.PC04@3477.96,3518.52 3682.44,3723 v1(3683,3723) ; P7.PC04@4777.96,3518.52 4874.52,3518.52 v1(4981,3625) ; v1(8043,3622.04) 8043,6288 v1(8044,6289)
-12V: C70.2 C83.2 J7.3 P1A.PC02 P1B.PC02 P1C.PC02 P3A.PC02 P3B.PC02 P3C.PC02 P4.PC02 P6.PC02 P7.PC02 TP111.1 U2.4 | length 31885.1
  Top Layer (*.GTL) w25: C83.2@460,7575 460,7760 J7.3@500,7800
  MidLayer2 (*.G2) w50: TP111.1@200,6800 473,6800 v1(477,6804) 3068,6804 v1(3070,6802) ; v1(609,3147) v1(877,3147) v1(2176,3147) v1(3476,3147) v1(4759,3147) v1(6948,3147) 11225,3147 11883,2489 12645,2489 v1(12851,2695) ; v1(6950,6612) v1(7278,6612) 9877.96,6612 v1@11187,6612
  MidLayer3 (*.G3) w50: J7.3@500,7800 502,7798 502,7312.02 477,7287.02 v1(477,6804) 477,5583 574,5486 574,4919.02 624,4869.02 624,4478.98 586,4440.98 586,4266.02 609,4243.02 v1(609,3147) ; v1(877,3147) 877.96,3147.96 P1A.PC02@877.96,3439.02 ; v1(2176,3147) 2177.96,3148.96 P1B.PC02@2177.96,3439.02 ; U2.4@2965,7411 3065,7311 C70.2@3065,7281 3065,6807 v1(3070,6802) ; v1(3476,3147) 3477.96,3148.96 P1C.PC02@3477.96,3439.02 ; v1(4759,3147) 4760,3148 4760,3365.98 4777.96,3383.94 P7.PC02@4777.96,3439.02 ; v1(6948,3147) 6950,3149 v1(6950,6612) ; P3A.PC02@7277.96,6329.02 v1(7278,6612) ; P3B.PC02@8577.96,6329.02 v1(8577.96,6608.96) ; P3C.PC02@9877.96,6329.02 v1(9877.96,6608.96) ; P6.PC02@11177.96,6329.02 11189,6340.06 v1(11189,6614) ; v1(12851,2695) 12877.96,2721.96 P4.PC02@12877.96,3439.02